# EAGLE board core (EAGLE 9.6.2), part 1 of 4
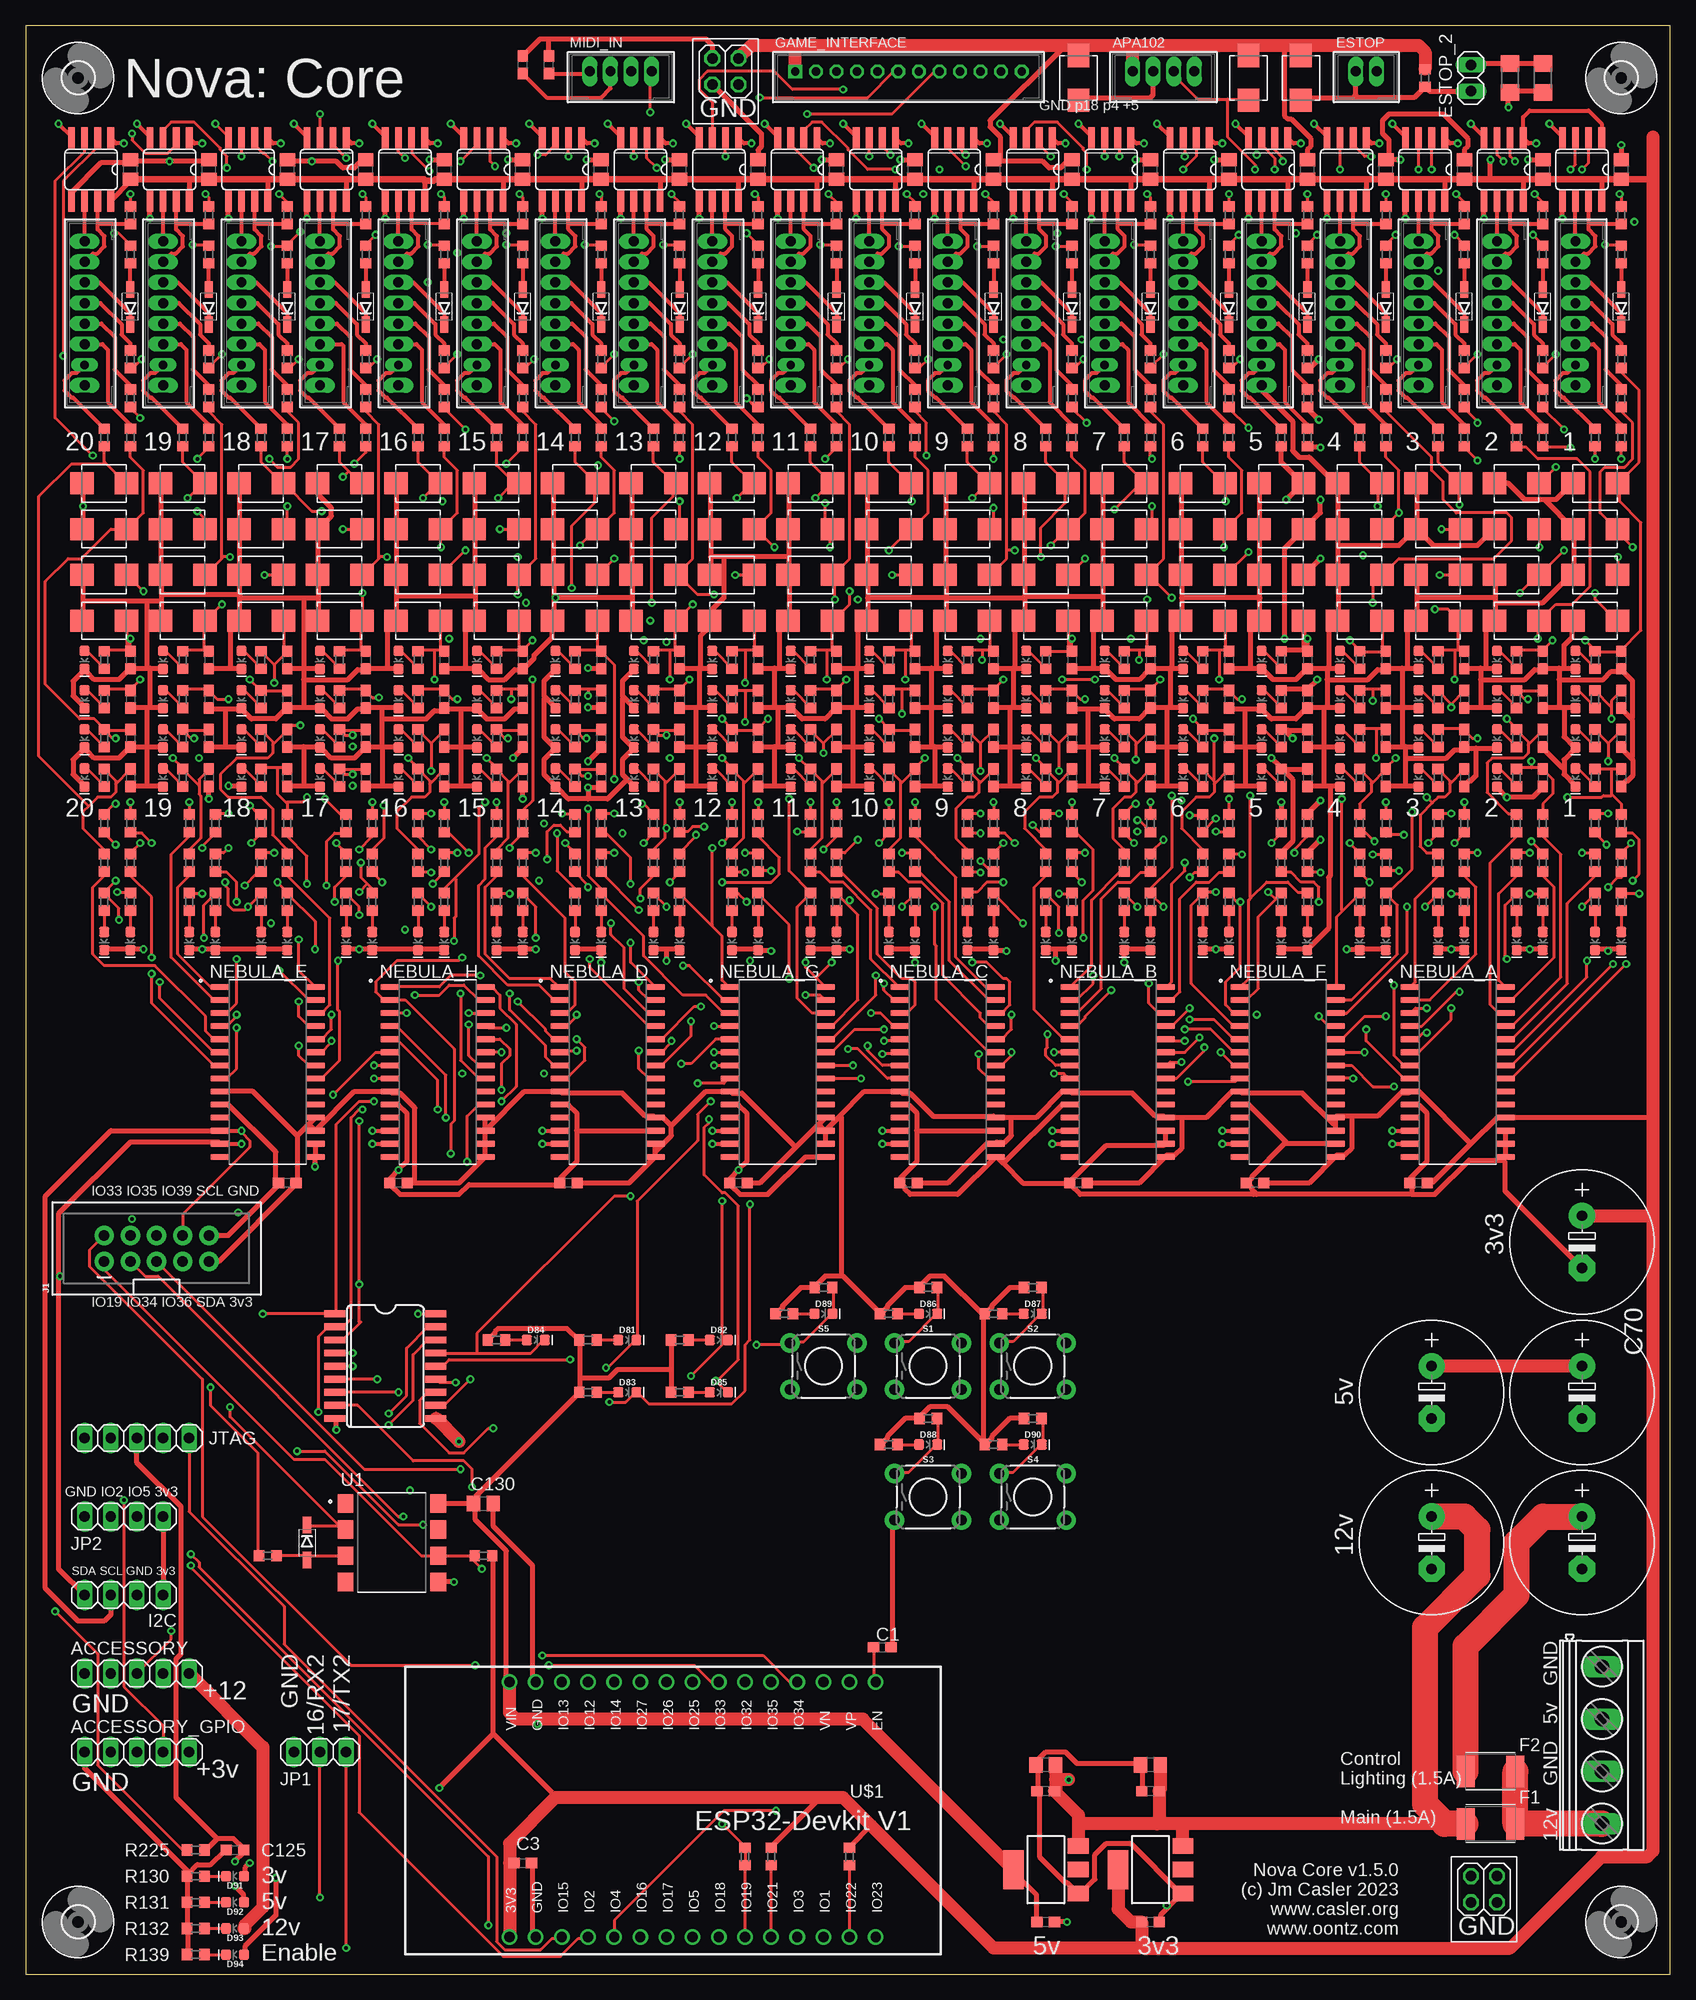
[diagram p0: board, top side]
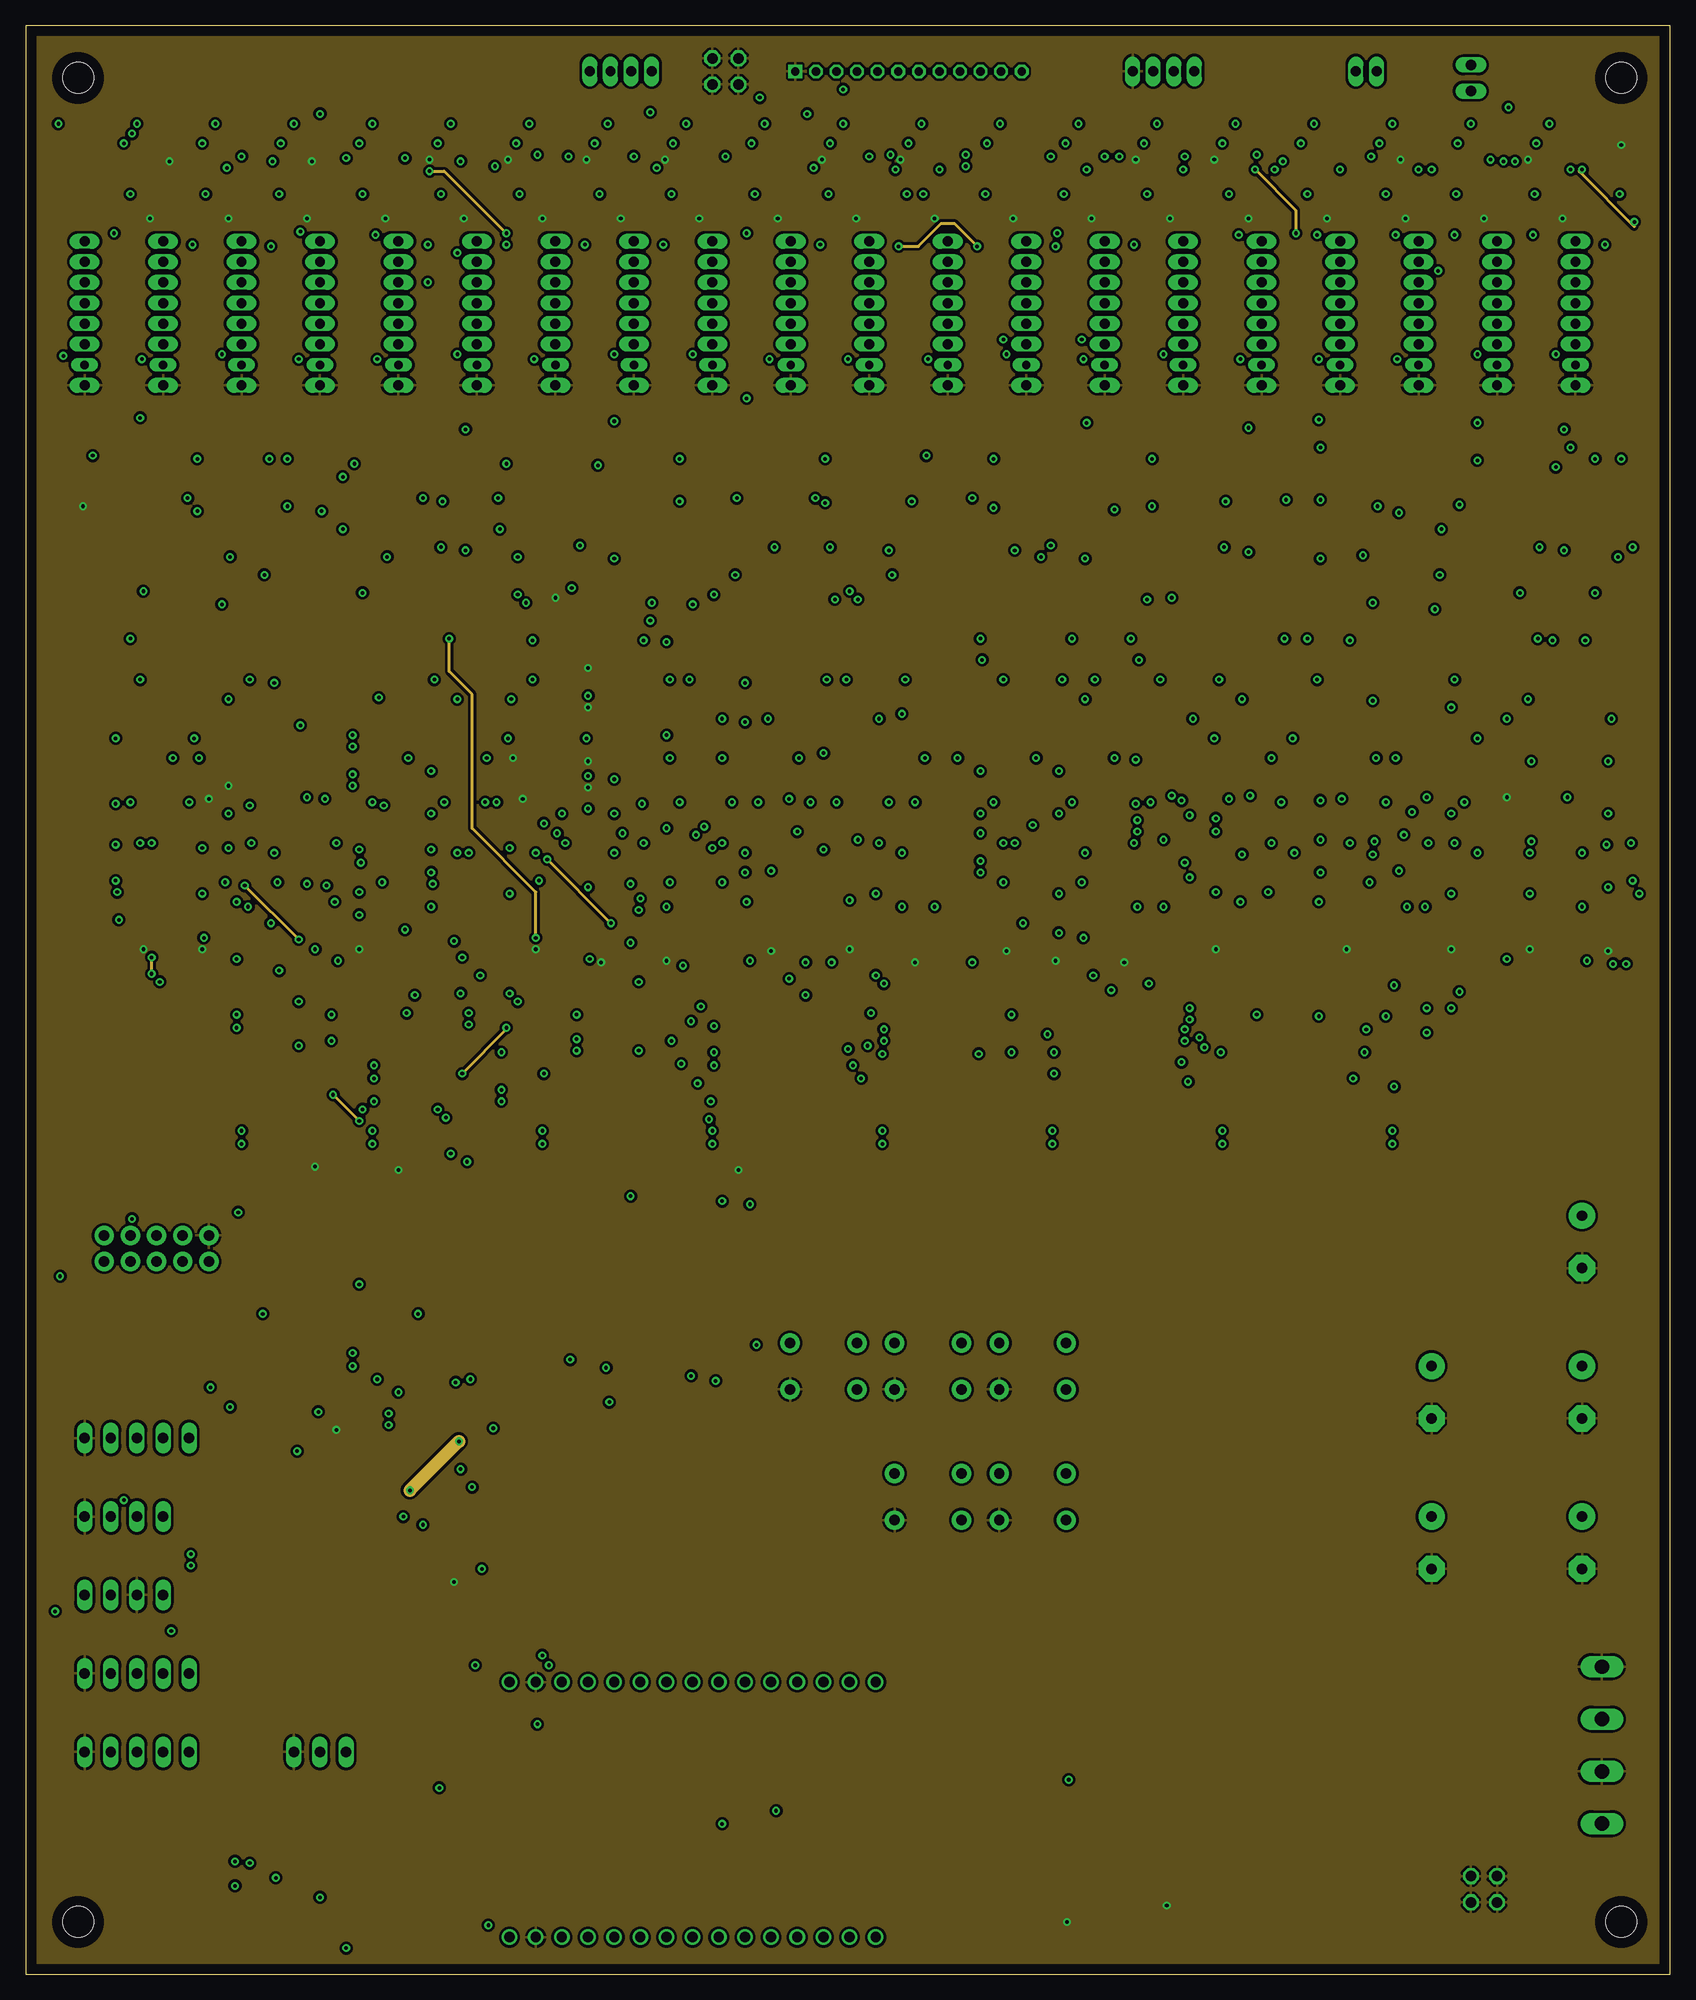
[diagram p1: board, inner layer $GND]
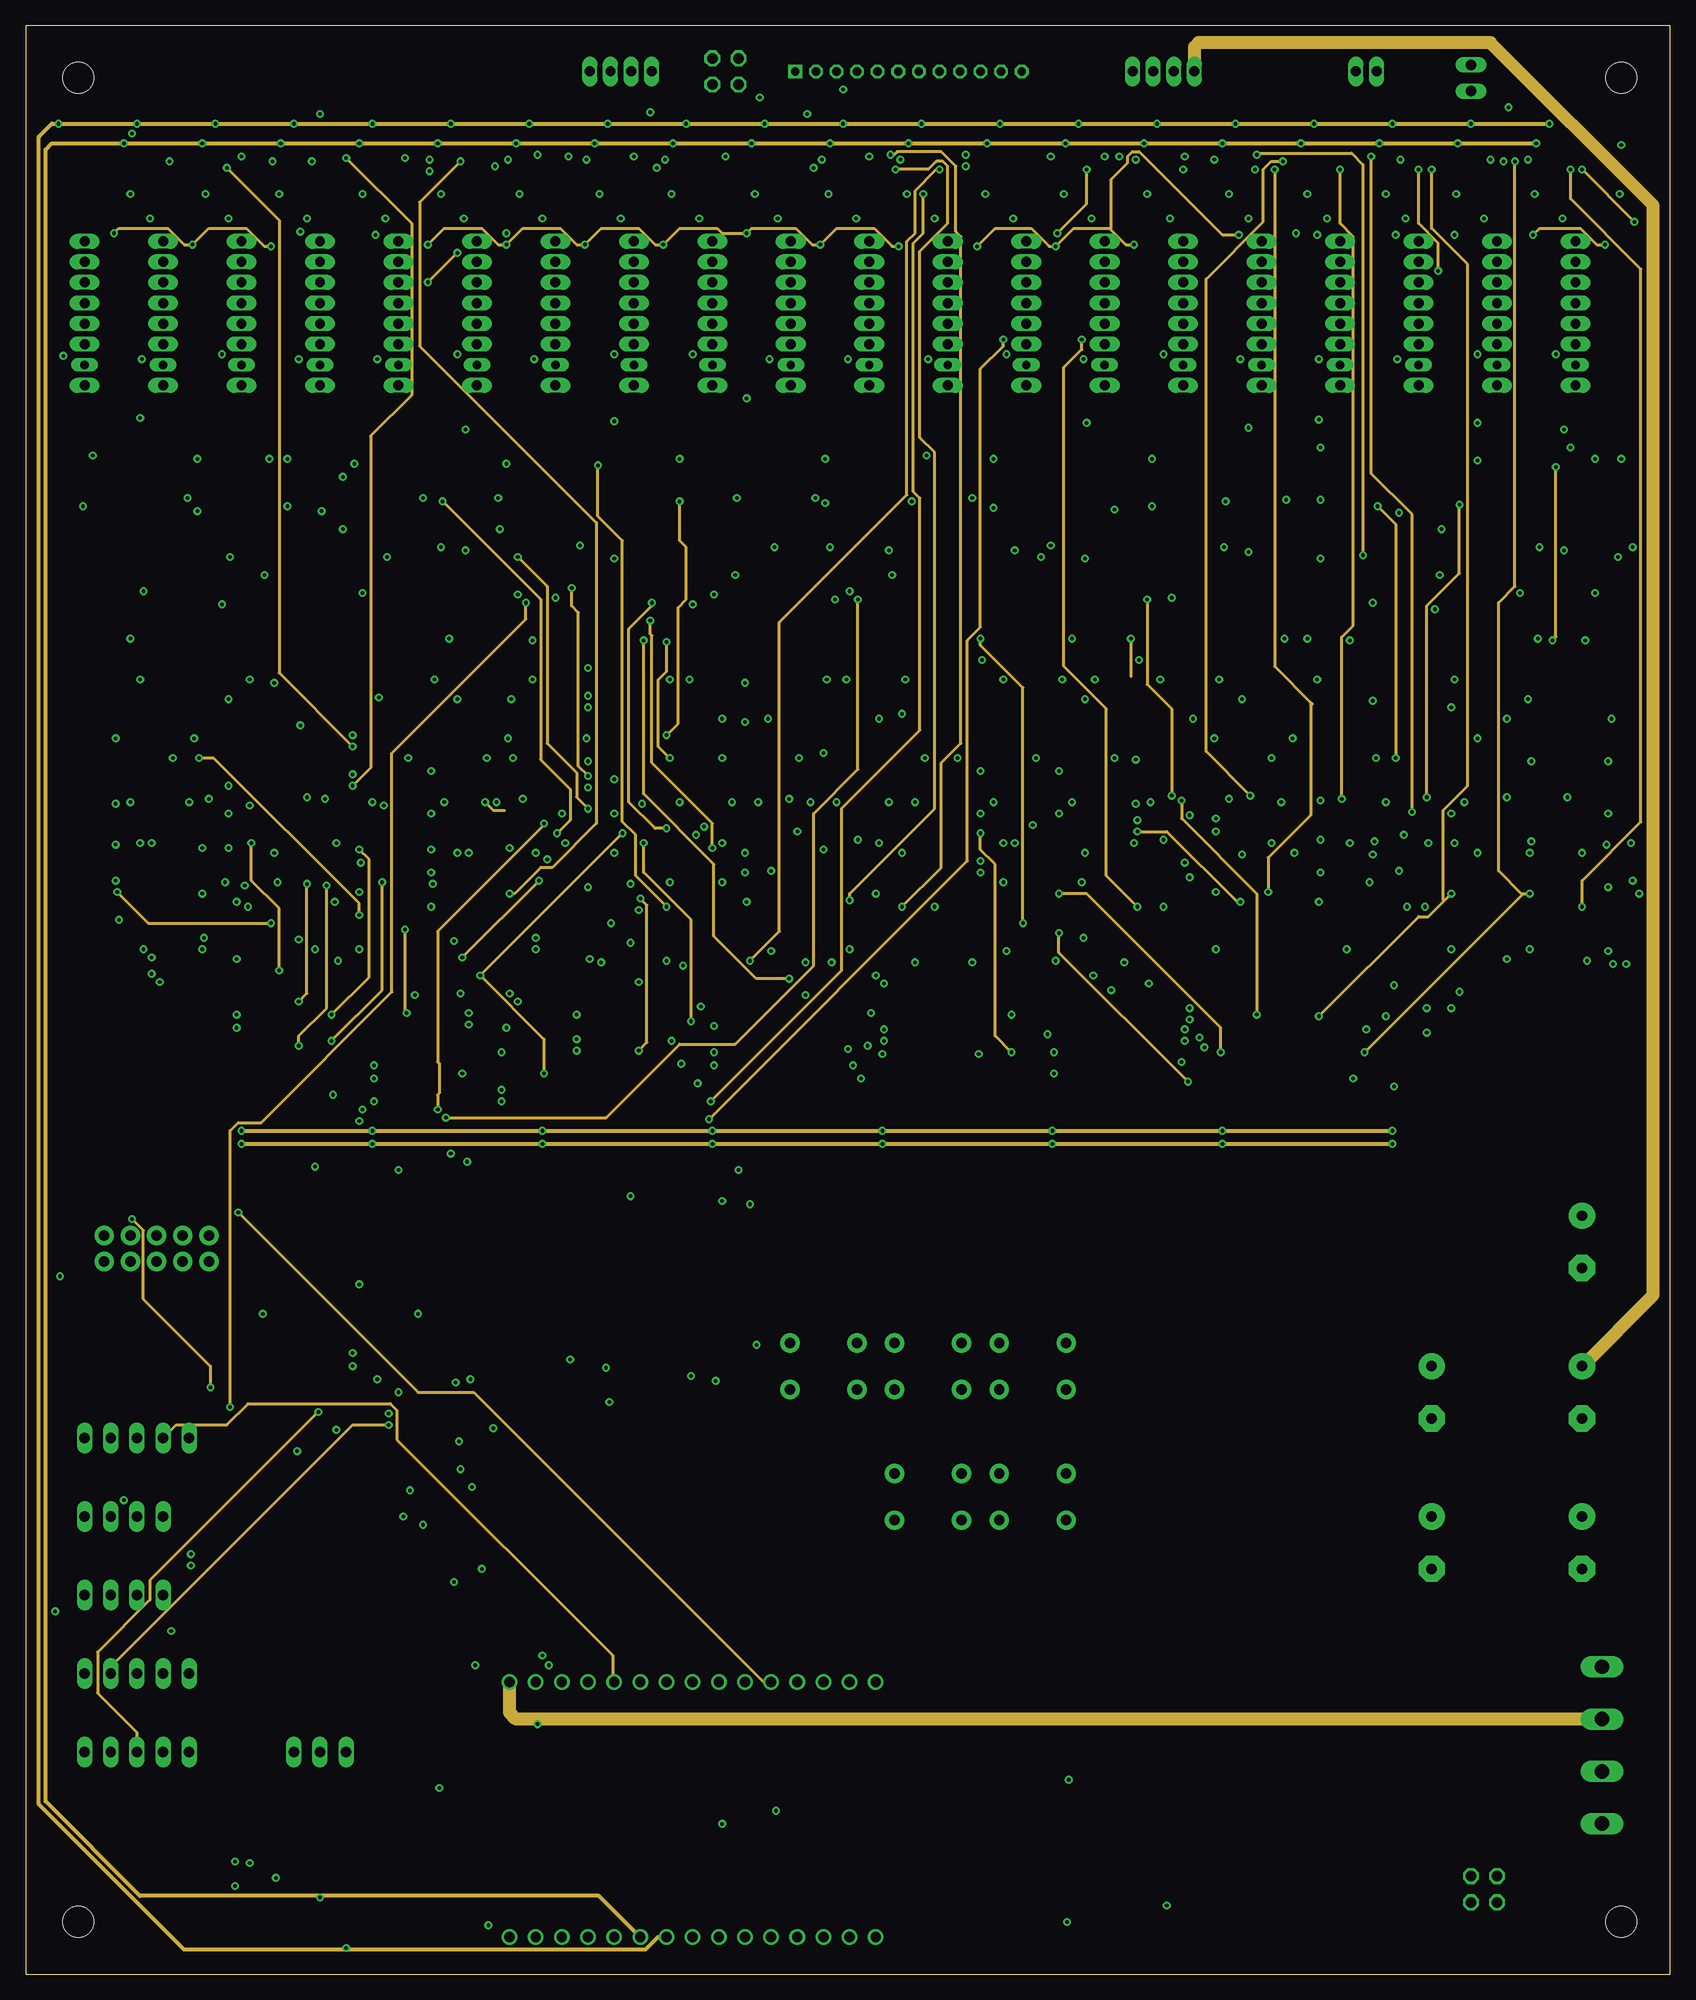
[diagram p2: board, inner layer SIGNAL3]
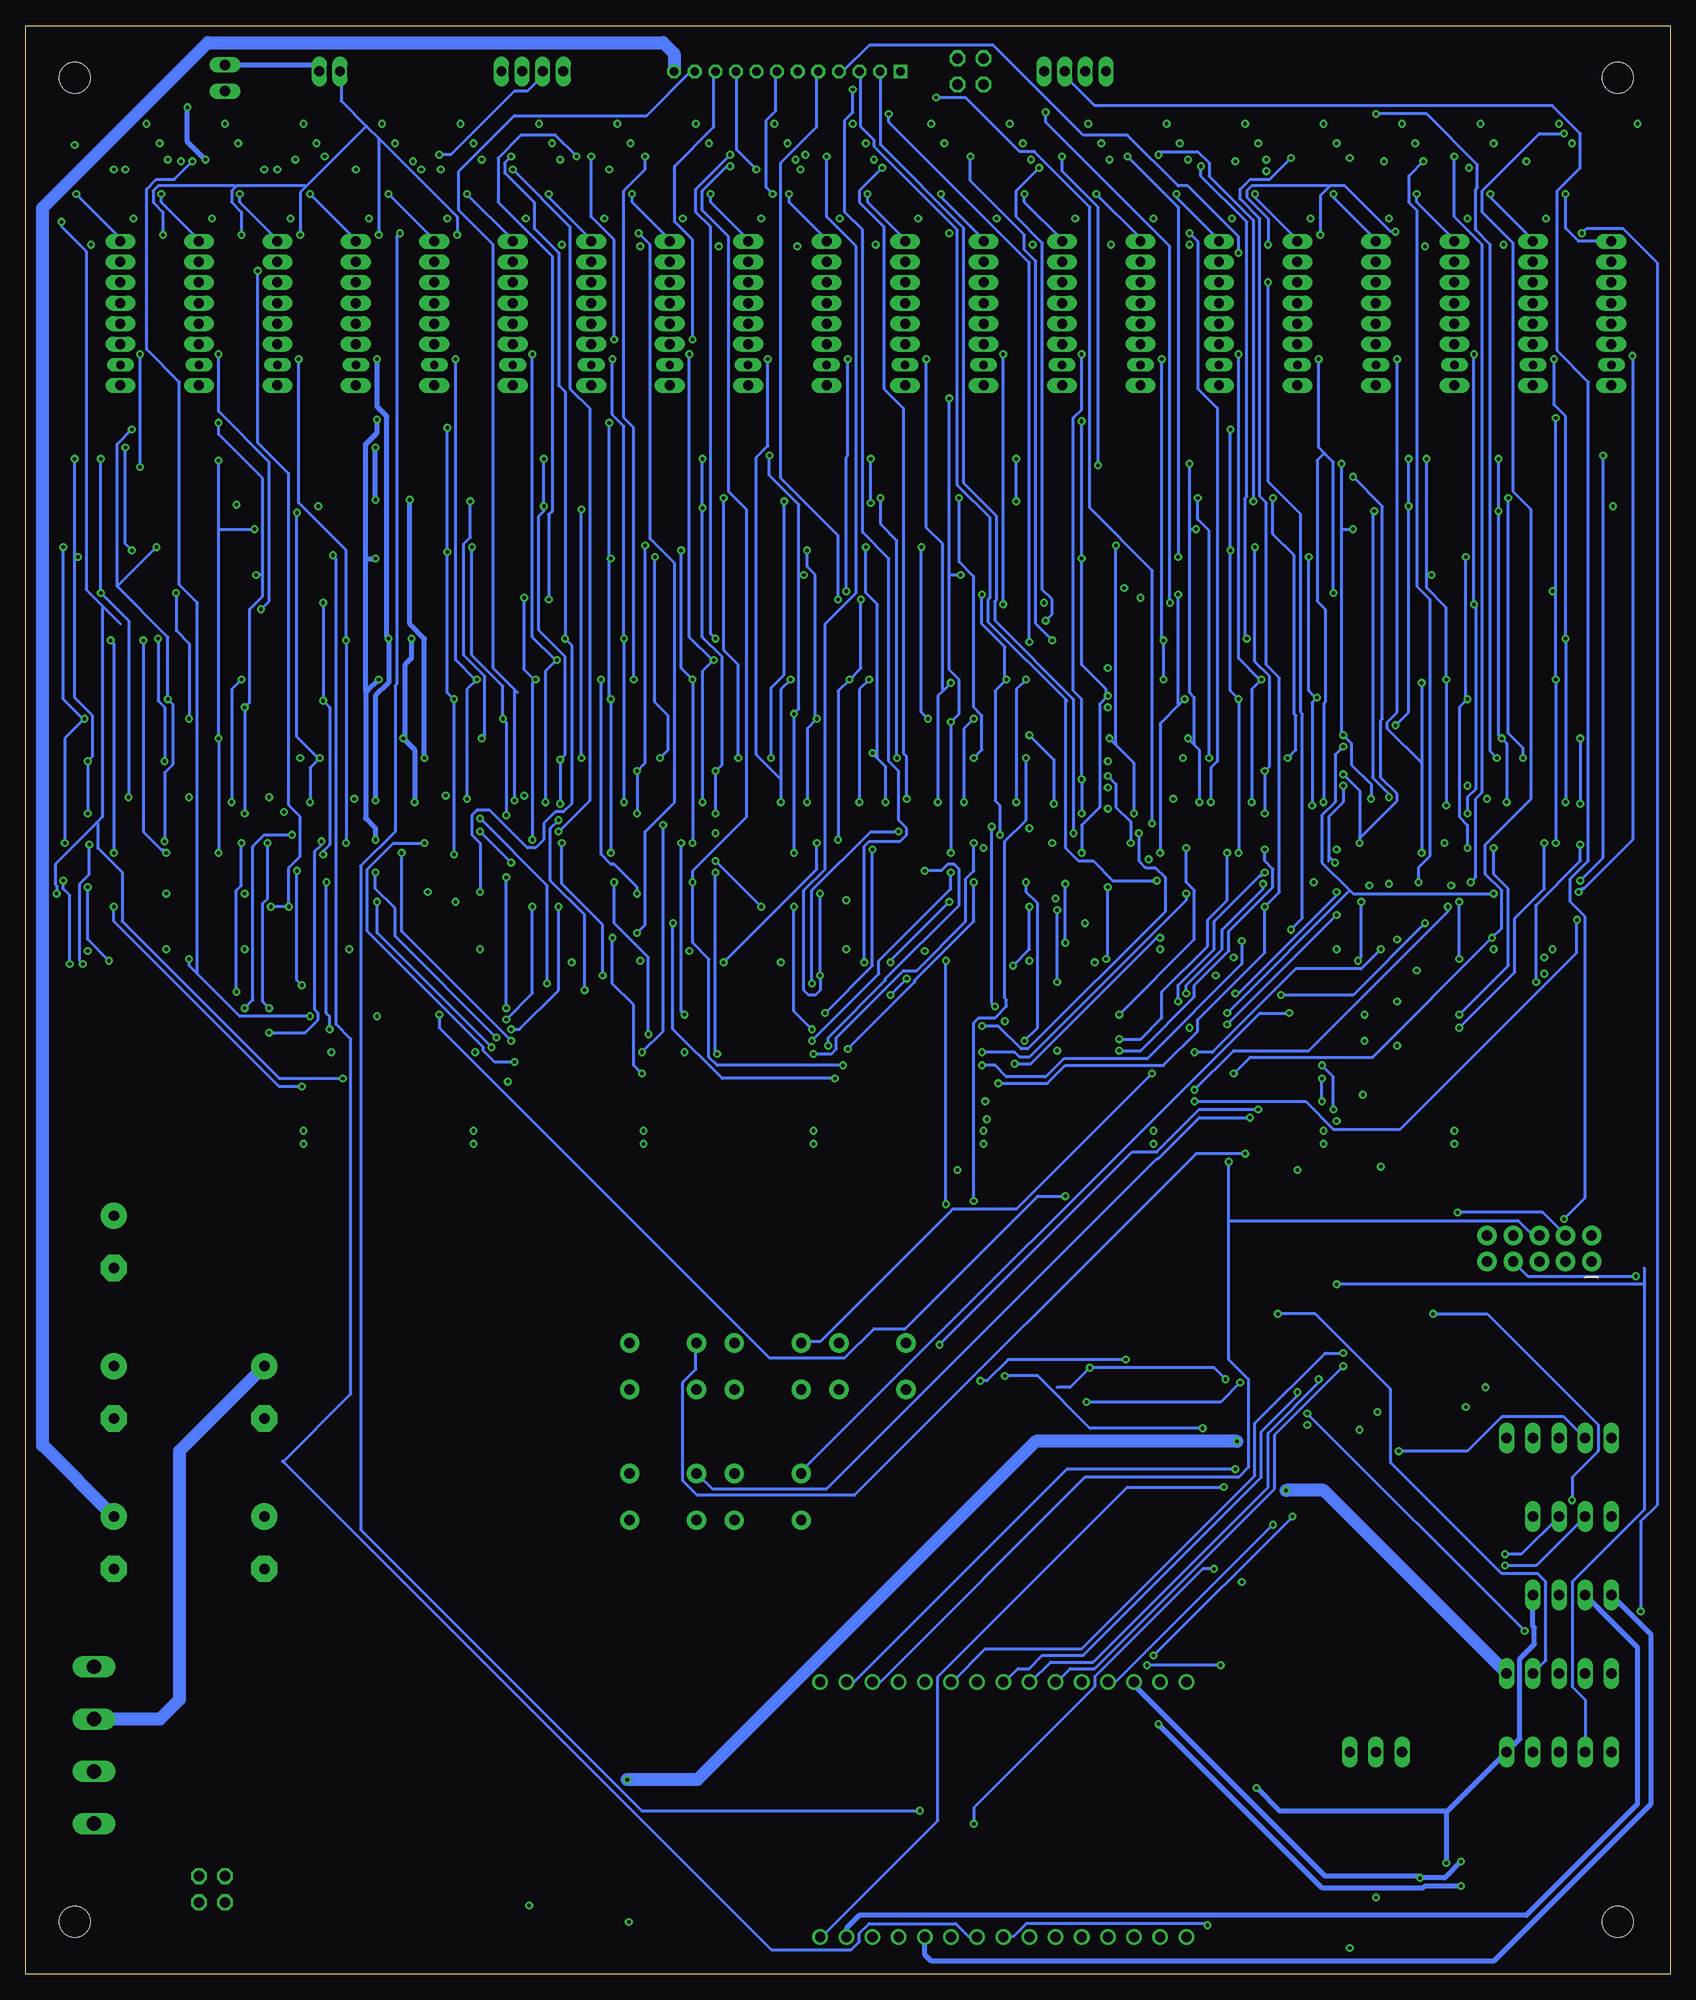
[diagram p3: board, bottom side, seen from below]

Size 159.69 x 189.22 mm. Coordinates in mm from the lower left corner, seen from the top.
Outline: 0,0 159.69,0 159.69,189.22 0,189.22 0,0
Copper layers (1+2*15+16): Top 0.035mm / dielectric 1.5mm / $GND 0.035mm / dielectric 0.15mm / SIGNAL3 0.035mm / dielectric 0.2mm / Bottom 0.035mm
Design rules "default *": minimum track width 6mil, minimum drill 0.35mm, track to track 6mil, track to pad 6mil, pad to pad 6mil, via to via 6mil, smd to smd 6mil, copper to edge 40mil, drill to drill 6mil, minimum pad ring 10mil, minimum via ring 8mil, stop-mask expansion 4mil, vias tented up to drill 20mil, thermal gap 10mil
Net classes: 0 default: width 0.305 mm, clearance 0.254 mm; 1 GND: width 0.508 mm, clearance 0.254 mm; 2 12V: width 1.27 mm, clearance 0.254 mm; 3 5V: width 0.508 mm, clearance 0.254 mm; 4 3V3: width 0.508 mm, clearance 0.254 mm

## Footprints (pad centres in the part's own frame; a part is rotated, then mirrored left to right if it is on the bottom)
1X05 = drill 1.016 long: 1 -5.08,0; 2 -2.54,0; 3 0,0; 4 2.54,0; 5 5.08,0
B4B-PH-K = drill 0.965 long: 1 -3,0; 2 -1,0; 3 1,0; 4 3,0
C0603 = smd 1.1 x 1: 1 -0.85,0; 2 0.85,0
C0805 = smd 1.3 x 1.5: 1 -0.95,0; 2 0.95,0
E5-13 = drill 1.016 pad 2.54: + -2.54,0 | drill 1.016 pad 2.54 octagon: - 2.54,0
LED-0603 = smd 1 x 1: A -0.877,0; C 0.877,0
SOD123 = smd 1.6 x 0.8: A 1.7,0; C -1.7,0
DIOM4336X265N = smd 2.28 x 2.12: 1 -2.165,0; 2 2.165,0
B2B-PH-K = drill 0.965 long: 1 -1,0; 2 1,0
1X02 = drill 1.016 long: 1 -1.27,0; 2 1.27,0
FUSC4632X160 = smd 1.73 x 3.05: 1 -2.415,0; 2 2.415,0
B12B-PH-K = drill 0.813 square: 1 -11,0 | drill 0.813 octagon: 2 -9,0; 3 -7,0; 4 -5,0; 5 -3,0; 6 -1,0; 7 1,0; 8 3,0; 9 5,0; 10 7,0; 11 9,0; 12 11,0
3,0 = hole 3: 0,0
1X04 = drill 1.016 long: 1 -3.81,0; 2 -1.27,0; 3 1.27,0; 4 3.81,0
SO08 = smd 0.66 x 2.032: 1 -1.905,-3.073; 2 -0.635,-3.073; 3 0.635,-3.073; 4 1.905,-3.073; 5 1.905,3.073; 6 0.635,3.073; 7 -0.635,3.073; 8 -1.905,3.073
SOT223 = smd 1.5 x 2: 1 -2.3,-3.15; 2 0,-3.15; 3 2.3,-3.15 | smd 3.8 x 2: 4 0,3.15
2X5-SHROUDED = drill 1.016 pad 1.88: 1 -1.27,5.08; 2 1.27,5.08; 3 -1.27,2.54; 4 1.27,2.54; 5 -1.27,0; 6 1.27,0; 7 -1.27,-2.54; 8 1.27,-2.54; 9 -1.27,-5.08; 10 1.27,-5.08
1X03 = drill 1.016 long: 1 -2.54,0; 2 0,0; 3 2.54,0
2X02 = drill 1.016 octagon: 1 -1.27,-1.27; 2 -1.27,1.27; 3 1.27,-1.27; 4 1.27,1.27
SOIC127P1030X265-28N = smd 1.9 x 0.6: 1 -4.605,8.255; 2 -4.605,6.985; 3 -4.605,5.715; 4 -4.605,4.445; 5 -4.605,3.175; 6 -4.605,1.905; 7 -4.605,0.635; 8 -4.605,-0.635; 9 -4.605,-1.905; 10 -4.605,-3.175; 11 -4.605,-4.445; 12 -4.605,-5.715; 13 -4.605,-6.985; 14 -4.605,-8.255; 15 4.605,-8.255; 16 4.605,-6.985; 17 4.605,-5.715; 18 4.605,-4.445; 19 4.605,-3.175; 20 4.605,-1.905; 21 4.605,-0.635; 22 4.605,0.635; 23 4.605,1.905; 24 4.605,3.175; 25 4.605,4.445; 26 4.605,5.715; 27 4.605,6.985; 28 4.605,8.255
MKDSN1,5/4-5,08 = drill 1.397 pad 2 long: 1 -7.641,0.025; 2 -2.561,0.025; 3 2.519,0.025; 4 7.599,0.025
R0603 = smd 1 x 1.1: 1 -0.85,0; 2 0.85,0
R1206 = smd 1.6 x 1.803: 1 -1.422,0; 2 1.422,0
TACTILE_SWITCH_PTH_6.0MM = drill 1.016 pad 1.88: 1 -3.251,2.261; 2 3.251,2.261; 3 -3.251,-2.261; 4 3.251,-2.261
B8B-PH-K = drill 0.965 long: 1 -7,0; 3 -3,0; 4 -1,0; 5 1,0; 6 3,0; 7 5,0; 8 7,0 | drill 0.813 long: 2 -5,0
COUPL_6N138SDM = smd 1.52 x 1.78: 1 -4.505,3.81; 2 -4.505,1.27; 3 -4.505,-1.27; 4 -4.505,-3.81; 5 4.505,-3.81; 6 4.505,-1.27; 7 4.505,1.27; 8 4.505,3.81
ESP32-DEVKITV1 = drill 1 pad 1.422: 1 -22.87,-13.54; 2 -20.33,-13.54; 3 -17.79,-13.54; 4 -15.25,-13.54; 5 -12.71,-13.54; 6 -10.17,-13.54; 7 -7.63,-13.54; 8 -5.09,-13.54; 9 -2.55,-13.54; 10 -0.01,-13.54; 11 2.53,-13.54; 12 5.07,-13.54; 13 7.61,-13.54; 14 10.15,-13.54; 15 12.69,-13.54; 16 12.69,11.23; 17 10.15,11.23; 18 7.61,11.23; 19 5.07,11.23; 20 2.53,11.23; 21 -0.01,11.23; 22 -2.55,11.23; 23 -5.09,11.23; 24 -7.63,11.23; 25 -10.17,11.23; 26 -12.71,11.23; 27 -15.25,11.23; 28 -17.79,11.23; 29 -20.33,11.23; 30 -22.87,11.23
SO18L = smd 0.66 x 2.032: 1 -0.635,-4.902; 2 0.635,-4.902; 3 1.905,-4.902; 4 3.175,-4.902; 5 4.445,-4.902; 6 5.715,-4.902; 7 6.985,-4.902; 8 8.255,-4.902; 9 9.525,-4.902; 10 9.525,4.902; 11 8.255,4.902; 12 6.985,4.902; 13 5.715,4.902; 14 4.445,4.902; 15 3.175,4.902; 16 1.905,4.902; 17 0.635,4.902; 18 -0.635,4.902

## Placement (x,y rotation side)
ACCESSORY  [1X05]  10.79,29.21 0 top
ACCESSORY_GPIO  [1X05]  10.79,21.59 0 top
APA102  B4B-PH-K  [B4B-PH-K]  110.49,184.78 0 top
C1  10uf  [C0603]  83.19,31.75 0 top
C2  10uf  [C0603]  99.06,17.78 180 top
C3  10uf  [C0603]  48.26,10.79 0 top
C4  1uf  [C0805]  99.06,20.32 180 top
C5  10uf  [C0603]  99.06,5.08 0 top
C6  1uf  [C0805]  109.22,20.32 180 top
C7  10uf  [C0603]  25.4,76.83 180 top
C8  10uf  [C0603]  135.25,76.83 180 top
C9  10uf  [C0603]  85.72,76.83 180 top
C10  10uf  [C0603]  102.23,76.83 180 top
C11  10uf  [C0603]  52.7,76.83 180 top
C12  10uf  [C0603]  119.38,76.83 180 top
C13  10uf  [C0603]  69.22,76.83 180 top
C14  1uf  [C0805]  154.94,175.26 90 top
C15  1uf  [C0805]  147.32,175.26 90 top
C16  1uf  [C0805]  139.7,175.26 90 top
C17  1uf  [C0805]  132.08,175.26 90 top
C18  1uf  [C0805]  124.46,175.26 90 top
C19  1uf  [C0805]  116.84,175.26 90 top
C20  1uf  [C0805]  109.22,175.26 90 top
C21  1uf  [C0805]  101.6,175.26 90 top
C22  1uf  [C0805]  93.98,175.26 90 top
C23  1uf  [C0805]  86.36,175.26 90 top
C24  1uf  [C0805]  78.74,175.26 90 top
C25  1uf  [C0805]  71.12,175.26 90 top
C26  1uf  [C0805]  10.16,175.26 90 top
C27  1uf  [C0805]  17.78,175.26 90 top
C28  1uf  [C0805]  25.4,175.26 90 top
C29  1uf  [C0805]  33.02,175.26 90 top
C30  1uf  [C0805]  40.64,175.26 90 top
C31  1uf  [C0805]  48.26,175.26 90 top
C32  1uf  [C0805]  55.88,175.26 90 top
C33  1uf  [C0805]  63.5,175.26 90 top
C34  10uf  [C0603]  36.2,76.83 180 top
C35  10uf  [C0603]  109.22,17.78 180 top
C36  10uf  [C0603]  109.22,5.08 0 top
C37  100nf  [C0603]  154.94,116.2 270 top
C38  100nf  [C0603]  154.94,120.02 270 top
C39  100nf  [C0603]  154.94,123.83 270 top
C40  100nf  [C0603]  154.94,127.64 270 top
C41  100nf  [C0603]  147.32,116.2 270 top
C42  100nf  [C0603]  147.32,120.02 270 top
C43  100nf  [C0603]  147.32,123.83 270 top
C44  100nf  [C0603]  147.32,127.64 270 top
C45  100nf  [C0603]  139.7,116.2 270 top
C46  100nf  [C0603]  139.7,120.02 270 top
C47  100nf  [C0603]  139.7,123.83 270 top
C48  100nf  [C0603]  139.7,127.64 270 top
C49  100nf  [C0603]  132.08,116.2 270 top
C50  100nf  [C0603]  132.08,120.02 270 top
C51  100nf  [C0603]  132.08,123.83 270 top
C52  100nf  [C0603]  132.08,127.64 270 top
C53  100nf  [C0603]  124.46,116.2 270 top
C54  100nf  [C0603]  124.46,120.02 270 top
C55  100nf  [C0603]  124.46,123.83 270 top
C56  100nf  [C0603]  124.46,127.64 270 top
C57  100nf  [C0603]  116.84,116.2 270 top
C58  100nf  [C0603]  116.84,120.02 270 top
C59  100nf  [C0603]  116.84,123.83 270 top
C60  100nf  [C0603]  116.84,127.64 270 top
C61  100nf  [C0603]  109.22,116.2 270 top
C62  100nf  [C0603]  109.22,120.02 270 top
C63  100nf  [C0603]  109.22,123.83 270 top
C64  100nf  [C0603]  109.22,127.64 270 top
C65  100nf  [C0603]  101.6,116.2 270 top
C66  100nf  [C0603]  101.6,120.02 270 top
C67  100nf  [C0603]  101.6,123.83 270 top
C68  100nf  [C0603]  101.6,127.64 270 top
C69  470uf  [E5-13]  151.13,56.52 270 top
C70  470uf  [E5-13]  151.13,71.12 270 top
C71  470uf  [E5-13]  136.53,56.52 270 top
C73  100nf  [C0603]  93.98,116.2 270 top
C74  100nf  [C0603]  93.98,120.02 270 top
C75  100nf  [C0603]  93.98,123.83 270 top
C76  100nf  [C0603]  93.98,127.64 270 top
C77  100nf  [C0603]  86.36,116.2 270 top
C78  100nf  [C0603]  86.36,120.02 270 top
C79  100nf  [C0603]  86.36,123.83 270 top
C80  100nf  [C0603]  86.36,127.64 270 top
C81  100nf  [C0603]  78.74,116.2 270 top
C82  100nf  [C0603]  78.74,120.02 270 top
C83  100nf  [C0603]  78.74,123.83 270 top
C84  100nf  [C0603]  78.74,127.64 270 top
C85  100nf  [C0603]  71.12,116.2 270 top
C86  100nf  [C0603]  71.12,120.02 270 top
C87  100nf  [C0603]  71.12,123.83 270 top
C88  100nf  [C0603]  71.12,127.64 270 top
C89  2200uf  [E5-13]  136.53,41.91 270 top
C90  2200uf  [E5-13]  151.13,41.91 270 top
C93  100nf  [C0603]  63.5,116.2 270 top
C94  100nf  [C0603]  63.5,120.02 270 top
C95  100nf  [C0603]  63.5,123.83 270 top
C96  100nf  [C0603]  63.5,127.64 270 top
C97  100nf  [C0603]  48.26,116.2 270 top
C98  100nf  [C0603]  48.26,120.02 270 top
C99  100nf  [C0603]  48.26,123.83 270 top
C100  100nf  [C0603]  48.26,127.64 270 top
C101  100nf  [C0603]  55.88,116.2 270 top
C102  100nf  [C0603]  55.88,120.02 270 top
C103  100nf  [C0603]  55.88,123.83 270 top
C104  100nf  [C0603]  55.88,127.64 270 top
C105  100nf  [C0603]  40.64,116.2 270 top
C106  100nf  [C0603]  40.64,120.02 270 top
C107  100nf  [C0603]  40.64,123.83 270 top
C108  100nf  [C0603]  40.64,127.64 270 top
C109  100nf  [C0603]  33.02,116.2 270 top
C110  100nf  [C0603]  33.02,120.02 270 top
C111  100nf  [C0603]  33.02,123.83 270 top
C112  100nf  [C0603]  33.02,127.64 270 top
C113  100nf  [C0603]  25.4,116.2 270 top
C114  100nf  [C0603]  25.4,120.02 270 top
C115  100nf  [C0603]  25.4,123.83 270 top
C116  100nf  [C0603]  25.4,127.64 270 top
C117  100nf  [C0603]  17.78,116.2 270 top
C118  100nf  [C0603]  17.78,120.02 270 top
C119  100nf  [C0603]  17.78,123.83 270 top
C120  100nf  [C0603]  17.78,127.64 270 top
C121  100nf  [C0603]  10.16,116.2 270 top
C122  100nf  [C0603]  10.16,120.02 270 top
C123  100nf  [C0603]  10.16,123.83 270 top
C124  1nf  [C0603]  10.16,127.64 270 top
C125  C_1NF/50V_0603  [C0603]  20.32,12.06 0 top
C126  C_100NF/50V_0603  [C0603]  50.8,185.42 90 top
C127  C_100NF/50V_0603  [C0603]  48.26,185.42 90 top
C130  1uf  [C0805]  44.45,45.72 0 top
D1  [LED-0603]  59.05,116.2 270 top
D2  [LED-0603]  150.5,116.2 270 top
D3  [LED-0603]  150.5,120.02 270 top
D4  [LED-0603]  150.5,123.83 270 top
D5  [LED-0603]  150.5,127.64 270 top
D6  [LED-0603]  142.88,116.2 270 top
D7  [LED-0603]  142.88,120.02 270 top
D8  [LED-0603]  142.88,123.83 270 top
D9  [LED-0603]  142.88,127.64 270 top
D10  [LED-0603]  135.25,116.2 270 top
D11  [LED-0603]  135.25,120.02 270 top
D12  [LED-0603]  135.25,123.83 270 top
D13  [LED-0603]  135.25,127.64 270 top
D14  [LED-0603]  127.64,116.2 270 top
D15  [LED-0603]  127.64,120.02 270 top
D16  [LED-0603]  127.64,123.83 270 top
D17  [LED-0603]  127.64,127.64 270 top
D18  [LED-0603]  120.02,116.2 270 top
D19  [LED-0603]  120.02,120.02 270 top
D20  [LED-0603]  120.02,123.83 270 top
D21  [LED-0603]  120.02,127.64 270 top
D22  [LED-0603]  112.39,116.2 270 top
D23  [LED-0603]  112.39,120.02 270 top
D24  [LED-0603]  112.39,123.83 270 top
D25  [LED-0603]  112.39,127.64 270 top
D26  [LED-0603]  104.78,116.2 270 top
D27  [LED-0603]  104.78,120.02 270 top
D28  [LED-0603]  104.78,123.83 270 top
D29  [LED-0603]  104.78,127.64 270 top
D30  [LED-0603]  97.16,116.2 270 top
D31  [LED-0603]  97.16,120.02 270 top
D32  [LED-0603]  97.16,123.83 270 top
D33  [LED-0603]  97.16,127.64 270 top
D34  [LED-0603]  89.53,116.2 270 top
D35  [LED-0603]  89.53,120.02 270 top
D36  [LED-0603]  89.53,123.83 270 top
D37  [LED-0603]  89.53,127.64 270 top
D38  [LED-0603]  81.92,116.2 270 top
D39  [LED-0603]  81.92,120.02 270 top
D40  [LED-0603]  81.92,123.83 270 top
D41  [LED-0603]  81.92,127.64 270 top
D42  [LED-0603]  74.3,116.2 270 top
D43  [LED-0603]  74.3,120.02 270 top
D44  [LED-0603]  74.3,123.83 270 top
D45  [LED-0603]  74.3,127.64 270 top
D46  [LED-0603]  66.67,116.2 270 top
D47  [LED-0603]  66.67,120.02 270 top
D48  [LED-0603]  66.67,123.83 270 top
D49  [LED-0603]  66.67,127.64 270 top
D50  [LED-0603]  59.05,120.02 270 top
D51  [LED-0603]  59.05,123.83 270 top
D52  [LED-0603]  59.05,127.64 270 top
D53  [LED-0603]  51.44,116.2 270 top
D54  [LED-0603]  51.44,120.02 270 top
D55  [LED-0603]  51.44,123.83 270 top
D56  [LED-0603]  51.44,127.64 270 top
D57  [LED-0603]  43.81,116.2 270 top
D58  [LED-0603]  43.81,120.02 270 top
D59  [LED-0603]  43.81,123.83 270 top
D60  [LED-0603]  43.81,127.64 270 top
D61  [LED-0603]  36.2,116.2 270 top
D62  [LED-0603]  36.2,120.02 270 top
D63  [LED-0603]  36.2,123.83 270 top
D64  [LED-0603]  36.2,127.64 270 top
D65  [LED-0603]  28.57,116.2 270 top
D66  [LED-0603]  28.57,120.02 270 top
D67  [LED-0603]  28.57,123.83 270 top
D68  [LED-0603]  28.57,127.64 270 top
D69  [LED-0603]  20.95,116.2 270 top
D70  [LED-0603]  20.95,120.02 270 top
D71  [LED-0603]  20.95,123.83 270 top
D72  [LED-0603]  20.95,127.64 270 top
D73  [LED-0603]  13.34,116.2 270 top
D74  [LED-0603]  13.34,120.02 270 top
D75  [LED-0603]  13.34,123.83 270 top
D76  [LED-0603]  13.34,127.64 270 top
D77  [LED-0603]  5.71,116.2 270 top
D78  [LED-0603]  5.71,120.02 270 top
D79  [LED-0603]  5.71,123.83 270 top
D80  [LED-0603]  5.71,127.64 270 top
D81  red  [LED-0603]  58.42,61.59 0 top
D82  green  [LED-0603]  67.31,61.59 0 top
D83  blue  [LED-0603]  58.42,56.52 0 top
D84  white  [LED-0603]  49.53,61.59 0 top
D85  yellow  [LED-0603]  67.31,56.52 0 top
D86  red  [LED-0603]  87.63,64.14 0 top
D87  green  [LED-0603]  97.79,64.14 0 top
D88  blue  [LED-0603]  87.63,51.44 0 top
D89  white  [LED-0603]  77.47,64.14 0 top
D90  yellow  [LED-0603]  97.79,51.44 0 top
D91  red  [LED-0603]  20.32,9.53 180 top
D92  green  [LED-0603]  20.32,6.99 180 top
D93  blue  [LED-0603]  20.32,4.45 180 top
D94  yellow  [LED-0603]  20.32,1.91 180 top
D95  D_B5819W-SL_CHANGJ_SOD123  [SOD123]  154.94,161.93 90 top
D96  D_B5819W-SL_CHANGJ_SOD123  [SOD123]  147.32,161.93 90 top
D97  D_B5819W-SL_CHANGJ_SOD123  [SOD123]  139.7,161.93 90 top
D98  D_B5819W-SL_CHANGJ_SOD123  [SOD123]  132.08,161.93 90 top
D99  D_B5819W-SL_CHANGJ_SOD123  [SOD123]  124.46,161.93 90 top
D100  D_B5819W-SL_CHANGJ_SOD123  [SOD123]  116.84,161.93 90 top
D101  D_B5819W-SL_CHANGJ_SOD123  [SOD123]  109.22,161.93 90 top
D102  D_B5819W-SL_CHANGJ_SOD123  [SOD123]  101.6,161.93 90 top
D103  D_B5819W-SL_CHANGJ_SOD123  [SOD123]  93.98,161.93 90 top
D104  D_B5819W-SL_CHANGJ_SOD123  [SOD123]  63.5,161.93 90 top
D105  D_B5819W-SL_CHANGJ_SOD123  [SOD123]  33.02,161.93 90 top
D106  D_B5819W-SL_CHANGJ_SOD123  [SOD123]  86.36,161.93 90 top
D107  D_B5819W-SL_CHANGJ_SOD123  [SOD123]  78.74,161.93 90 top
D108  D_B5819W-SL_CHANGJ_SOD123  [SOD123]  71.12,161.93 90 top
D109  D_B5819W-SL_CHANGJ_SOD123  [SOD123]  55.88,161.93 90 top
D110  D_B5819W-SL_CHANGJ_SOD123  [SOD123]  48.26,161.93 90 top
D111  D_B5819W-SL_CHANGJ_SOD123  [SOD123]  40.64,161.93 90 top
D112  D_B5819W-SL_CHANGJ_SOD123  [SOD123]  25.4,161.93 90 top
D113  D_B5819W-SL_CHANGJ_SOD123  [SOD123]  17.78,161.93 90 top
D114  D_B5819W-SL_CHANGJ_SOD123  [SOD123]  10.16,161.93 90 top
D115  SMBJ8.0CA  [DIOM4336X265N]  152.4,135.89 0 top
D116  SMBJ8.0CA  [DIOM4336X265N]  152.4,131.44 0 top
D117  SMBJ8.0CA  [DIOM4336X265N]  152.4,140.34 0 top
D118  SMBJ8.0CA  [DIOM4336X265N]  152.4,144.78 0 top
D119  SMBJ8.0CA  [DIOM4336X265N]  144.78,131.44 0 top
D120  SMBJ8.0CA  [DIOM4336X265N]  144.78,135.89 0 top
D121  SMBJ8.0CA  [DIOM4336X265N]  144.78,140.34 0 top
D122  SMBJ8.0CA  [DIOM4336X265N]  144.78,144.78 0 top
D123  SMBJ8.0CA  [DIOM4336X265N]  137.16,144.78 0 top
D124  SMBJ8.0CA  [DIOM4336X265N]  137.16,140.34 0 top
D125  SMBJ8.0CA  [DIOM4336X265N]  137.16,135.89 0 top
D126  SMBJ8.0CA  [DIOM4336X265N]  137.16,131.44 0 top
D127  SMBJ8.0CA  [DIOM4336X265N]  129.54,144.78 0 top
D128  SMBJ8.0CA  [DIOM4336X265N]  129.54,140.34 0 top
D129  SMBJ8.0CA  [DIOM4336X265N]  129.54,135.89 0 top
D130  SMBJ8.0CA  [DIOM4336X265N]  129.54,131.44 0 top
D131  SMBJ8.0CA  [DIOM4336X265N]  121.92,144.78 0 top
D132  SMBJ8.0CA  [DIOM4336X265N]  121.92,140.34 0 top
D133  SMBJ8.0CA  [DIOM4336X265N]  121.92,135.89 0 top
D134  SMBJ8.0CA  [DIOM4336X265N]  121.92,131.44 0 top
D135  SMBJ8.0CA  [DIOM4336X265N]  114.3,144.78 0 top
D136  SMBJ8.0CA  [DIOM4336X265N]  114.3,140.34 0 top
D137  SMBJ8.0CA  [DIOM4336X265N]  114.3,135.89 0 top
D138  SMBJ8.0CA  [DIOM4336X265N]  114.3,131.44 0 top
D139  SMBJ8.0CA  [DIOM4336X265N]  106.68,144.78 0 top
D140  SMBJ8.0CA  [DIOM4336X265N]  106.68,140.34 0 top
D141  SMBJ8.0CA  [DIOM4336X265N]  106.68,135.89 0 top
D142  SMBJ8.0CA  [DIOM4336X265N]  106.68,131.44 0 top
D143  SMBJ8.0CA  [DIOM4336X265N]  99.06,144.78 0 top
D144  SMBJ8.0CA  [DIOM4336X265N]  99.06,140.34 0 top
D145  SMBJ8.0CA  [DIOM4336X265N]  99.06,135.89 0 top
D146  SMBJ8.0CA  [DIOM4336X265N]  99.06,131.44 0 top
D147  SMBJ8.0CA  [DIOM4336X265N]  91.44,144.78 0 top
D148  SMBJ8.0CA  [DIOM4336X265N]  91.44,140.34 0 top
D149  SMBJ8.0CA  [DIOM4336X265N]  91.44,135.89 0 top
D150  SMBJ8.0CA  [DIOM4336X265N]  91.44,131.44 0 top
D151  SMBJ8.0CA  [DIOM4336X265N]  83.82,144.78 0 top
D152  SMBJ8.0CA  [DIOM4336X265N]  83.82,140.34 0 top
D153  SMBJ8.0CA  [DIOM4336X265N]  83.82,135.89 0 top
D154  SMBJ8.0CA  [DIOM4336X265N]  83.82,131.44 0 top
D155  SMBJ8.0CA  [DIOM4336X265N]  76.2,144.78 0 top
D156  SMBJ8.0CA  [DIOM4336X265N]  76.2,140.34 0 top
D157  SMBJ8.0CA  [DIOM4336X265N]  76.2,135.89 0 top
D158  SMBJ8.0CA  [DIOM4336X265N]  76.2,131.44 0 top
D159  SMBJ8.0CA  [DIOM4336X265N]  68.58,144.78 0 top
D160  SMBJ8.0CA  [DIOM4336X265N]  68.58,140.34 0 top
D161  SMBJ8.0CA  [DIOM4336X265N]  68.58,135.89 0 top
D162  SMBJ8.0CA  [DIOM4336X265N]  68.58,131.44 0 top
D163  SMBJ8.0CA  [DIOM4336X265N]  60.96,144.78 0 top
D164  SMBJ8.0CA  [DIOM4336X265N]  60.96,140.34 0 top
D165  SMBJ8.0CA  [DIOM4336X265N]  60.96,135.89 0 top
D166  SMBJ8.0CA  [DIOM4336X265N]  60.96,131.44 0 top
D167  SMBJ8.0CA  [DIOM4336X265N]  53.34,144.78 0 top
D168  SMBJ8.0CA  [DIOM4336X265N]  53.34,140.34 0 top
D169  SMBJ8.0CA  [DIOM4336X265N]  53.34,135.89 0 top
D170  SMBJ8.0CA  [DIOM4336X265N]  53.34,131.44 0 top
D171  SMBJ8.0CA  [DIOM4336X265N]  123.83,184.15 270 top
D172  SMBJ8.0CA  [DIOM4336X265N]  45.72,144.78 0 top
D173  SMBJ8.0CA  [DIOM4336X265N]  45.72,140.34 0 top
D174  SMBJ8.0CA  [DIOM4336X265N]  45.72,135.89 0 top
D175  SMBJ8.0CA  [DIOM4336X265N]  45.72,131.44 0 top
D176  SMBJ8.0CA  [DIOM4336X265N]  38.1,144.78 0 top
D177  SMBJ8.0CA  [DIOM4336X265N]  38.1,140.34 0 top
D178  SMBJ8.0CA  [DIOM4336X265N]  38.1,135.89 0 top
D179  SMBJ8.0CA  [DIOM4336X265N]  38.1,131.44 0 top
D180  SMBJ8.0CA  [DIOM4336X265N]  30.48,144.78 0 top
D181  SMBJ8.0CA  [DIOM4336X265N]  30.48,140.34 0 top
D182  SMBJ8.0CA  [DIOM4336X265N]  30.48,135.89 0 top
D183  SMBJ8.0CA  [DIOM4336X265N]  30.48,131.44 0 top
D184  SMBJ8.0CA  [DIOM4336X265N]  22.86,144.78 0 top
D185  SMBJ8.0CA  [DIOM4336X265N]  22.86,140.34 0 top
D186  SMBJ8.0CA  [DIOM4336X265N]  22.86,135.89 0 top
D187  SMBJ8.0CA  [DIOM4336X265N]  22.86,131.44 0 top
D188  SMBJ8.0CA  [DIOM4336X265N]  15.24,144.78 0 top
D189  SMBJ8.0CA  [DIOM4336X265N]  15.24,140.34 0 top
D190  SMBJ8.0CA  [DIOM4336X265N]  15.24,135.89 0 top
D191  SMBJ8.0CA  [DIOM4336X265N]  15.24,131.44 0 top
D192  SMBJ8.0CA  [DIOM4336X265N]  7.62,144.78 0 top
D193  SMBJ8.0CA  [DIOM4336X265N]  7.62,140.34 0 top
D194  SMBJ8.0CA  [DIOM4336X265N]  7.62,135.89 0 top
D195  SMBJ8.0CA  [DIOM4336X265N]  7.62,131.44 0 top
D196  SMBJ8.0CA  [DIOM4336X265N]  118.75,184.15 270 top
D197  SMBJ8.0CA  [DIOM4336X265N]  102.23,184.15 270 top
D198  D_B5819W-SL_CHANGJ_SOD123  [SOD123]  27.3,41.91 270 top
D199  [LED-0603]  152.4,100.33 270 top
D200  [LED-0603]  154.94,100.33 270 top
D201  [LED-0603]  144.78,100.33 270 top
D202  [LED-0603]  147.32,100.33 270 top
D203  [LED-0603]  137.16,100.33 270 top
D204  [LED-0603]  139.7,100.33 270 top
D205  [LED-0603]  129.54,100.33 270 top
D206  [LED-0603]  132.08,100.33 270 top
D207  [LED-0603]  121.92,100.33 270 top
D208  [LED-0603]  124.46,100.33 270 top
D209  [LED-0603]  114.3,100.33 270 top
D210  [LED-0603]  116.84,100.33 270 top
D211  [LED-0603]  106.68,100.33 270 top
D212  [LED-0603]  109.22,100.33 270 top
D213  [LED-0603]  99.06,100.33 270 top
D214  [LED-0603]  101.6,100.33 270 top
D215  [LED-0603]  91.44,100.33 270 top
D216  [LED-0603]  93.98,100.33 270 top
D217  [LED-0603]  83.82,100.33 270 top
D218  [LED-0603]  86.36,100.33 270 top
D219  [LED-0603]  76.2,100.33 270 top
D220  [LED-0603]  78.74,100.33 270 top
D221  [LED-0603]  68.58,100.33 270 top
D222  [LED-0603]  71.12,100.33 270 top
D223  [LED-0603]  60.96,100.33 270 top
D224  [LED-0603]  63.5,100.33 270 top
D225  [LED-0603]  53.34,100.33 270 top
D226  [LED-0603]  55.88,100.33 270 top
D227  [LED-0603]  45.72,100.33 270 top
D228  [LED-0603]  48.26,100.33 270 top
D229  [LED-0603]  38.1,100.33 270 top
D230  [LED-0603]  40.64,100.33 270 top
D231  [LED-0603]  31.11,100.33 270 top
D232  [LED-0603]  33.66,100.33 270 top
D233  [LED-0603]  22.86,100.33 270 top
D234  [LED-0603]  25.4,100.33 270 top
D235  [LED-0603]  15.88,100.33 270 top
D236  [LED-0603]  18.41,100.33 270 top
D237  [LED-0603]  7.62,100.33 270 top
D238  [LED-0603]  10.16,100.33 270 top
ESTOP  B2B-PH-K  [B2B-PH-K]  130.18,184.78 0 top
ESTOP_2  [1X02]  140.34,184.15 90 top
F1  MF-MSMF-STYLE2_1  [FUSC4632X160]  142.24,14.61 180 top
F2  MF-MSMF-STYLE2_1  [FUSC4632X160]  142.24,19.68 180 top
GAME_INTERFACE  B12B-PH-K  [B12B-PH-K]  85.72,184.78 0 top
H1  MOUNT-HOLE3.0  [3,0]  154.94,5.08 0 top
H2  MOUNT-HOLE3.0  [3,0]  154.94,184.15 0 top
H3  MOUNT-HOLE3.0  [3,0]  5.08,184.15 0 top
H4  MOUNT-HOLE3.0  [3,0]  5.08,5.08 0 top
I2C  [1X04]  9.53,36.83 180 top
IC1  MAX481CSA  [SO08]  151.13,175.26 180 top
IC2  LD117AS12TR  [SOT223]  99.06,10.16 90 top
IC3  MAX481CSA  [SO08]  143.51,175.26 180 top
IC4  MAX481CSA  [SO08]  135.89,175.26 180 top
IC5  MAX481CSA  [SO08]  128.27,175.26 180 top
IC6  MAX481CSA  [SO08]  120.65,175.26 180 top
IC7  MAX481CSA  [SO08]  113.03,175.26 180 top
IC8  MAX481CSA  [SO08]  105.41,175.26 180 top
IC9  MAX481CSA  [SO08]  97.79,175.26 180 top
IC10  MAX481CSA  [SO08]  90.17,175.26 180 top
IC11  MAX481CSA  [SO08]  82.55,175.26 180 top
IC12  MAX481CSA  [SO08]  74.93,175.26 180 top
IC13  MAX481CSA  [SO08]  67.31,175.26 180 top
IC14  MAX481CSA  [SO08]  59.69,175.26 180 top
IC15  MAX481CSA  [SO08]  52.07,175.26 180 top
IC16  MAX481CSA  [SO08]  44.45,175.26 180 top
IC17  MAX481CSA  [SO08]  36.83,175.26 180 top
IC18  MAX481CSA  [SO08]  29.21,175.26 180 top
IC19  MAX481CSA  [SO08]  21.59,175.26 180 top
IC20  MAX481CSA  [SO08]  13.97,175.26 180 top
IC21  MAX481CSA  [SO08]  6.35,175.26 180 top
IC22  LD117AS12TR  [SOT223]  109.22,10.16 90 top
J1  [2X5-SHROUDED]  12.7,70.48 90 top
JP1  [1X03]  28.57,21.59 0 top
JP2  [1X04]  9.53,44.45 0 top
JP3  [2X02]  67.94,184.78 0 top
JP4  [2X02]  141.6,8.26 0 top
JTAG  [1X05]  10.79,52.07 0 top
MIDI_IN  B4B-PH-K  [B4B-PH-K]  57.78,184.78 0 top
NEBULA_A  MCP23017-E/SO  [SOIC127P1030X265-28N]  139.06,87.63 0 top
NEBULA_B  MCP23017-E/SO  [SOIC127P1030X265-28N]  106.05,87.63 0 top
NEBULA_C  MCP23017-E/SO  [SOIC127P1030X265-28N]  89.53,87.63 0 top
NEBULA_D  MCP23017-E/SO  [SOIC127P1030X265-28N]  56.52,87.63 0 top
NEBULA_E  MCP23017-E/SO  [SOIC127P1030X265-28N]  23.5,87.63 0 top
NEBULA_F  MCP23017-E/SO  [SOIC127P1030X265-28N]  122.56,87.63 0 top
NEBULA_G  MCP23017-E/SO  [SOIC127P1030X265-28N]  73.03,87.63 0 top
NEBULA_H  MCP23017-E/SO  [SOIC127P1030X265-28N]  40.01,87.63 0 top
POWER_IN  MKDSN1,5/4-5,08  [MKDSN1,5/4-5,08]  153.03,22.23 270 top
R1  120  [R0603]  154.94,170.81 270 top
R2  120  [R0603]  147.32,170.81 270 top
R3  1k  [R0603]  152.4,116.2 270 top
R4  1k  [R0603]  152.4,120.02 270 top
R5  1k  [R0603]  152.4,123.83 270 top
R6  1k  [R0603]  152.4,127.64 270 top
R7  1k  [R0603]  144.78,116.2 270 top
R8  1k  [R0603]  144.78,120.02 270 top
R9  1k  [R0603]  144.78,123.83 270 top
R10  1k  [R0603]  144.78,127.64 270 top
R11  1k  [R0603]  137.16,116.2 270 top
R12  1k  [R0603]  137.16,120.02 270 top
R13  1k  [R0603]  137.16,123.83 270 top
R14  1k  [R0603]  137.16,127.64 270 top
R15  1k  [R0603]  129.54,116.2 270 top
R16  1k  [R0603]  129.54,120.02 270 top
R17  1k  [R0603]  129.54,123.83 270 top
R18  1k  [R0603]  129.54,127.64 270 top
R19  1k  [R0603]  121.92,116.2 270 top
R20  1k  [R0603]  121.92,120.02 270 top
R21  1k  [R0603]  121.92,123.83 270 top
R22  1k  [R0603]  121.92,127.64 270 top
R23  1k  [R0603]  114.3,116.2 270 top
R24  1k  [R0603]  114.3,120.02 270 top
R25  1k  [R0603]  114.3,123.83 270 top
R26  R_2K_0603  [R0603]  72.39,11.43 90 top
R27  R_2K_0603  [R0603]  80.01,11.43 90 top
R28  1k  [R0603]  114.3,127.64 270 top
R29  1k  [R0603]  106.68,116.2 270 top
R30  1k  [R0603]  106.68,120.02 270 top
R31  1k  [R0603]  106.68,123.83 270 top
R32  1k  [R0603]  106.68,127.64 270 top
R33  1k  [R0603]  99.06,116.2 270 top
R34  1k  [R0603]  99.06,120.02 270 top
R35  1k  [R0603]  99.06,123.83 270 top
R36  1k  [R0603]  99.06,127.64 270 top
R37  1k  [R0603]  91.44,116.2 270 top
R38  1k  [R0603]  91.44,120.02 270 top
R39  1k  [R0603]  91.44,123.83 270 top
R40  1k  [R0603]  91.44,127.64 270 top
R41  1k  [R0603]  83.82,116.2 270 top
R42  1k  [R0603]  83.82,120.02 270 top
R43  1k  [R0603]  83.82,123.83 270 top
R44  1k  [R0603]  83.82,127.64 270 top
R45  1k  [R0603]  76.2,116.2 270 top
R46  1k  [R0603]  76.2,120.02 270 top
R47  1k  [R0603]  76.2,123.83 270 top
R48  1k  [R0603]  76.2,127.64 270 top
R49  1k  [R0603]  68.58,116.2 270 top
R50  1k  [R0603]  68.58,120.02 270 top
R51  1k  [R0603]  68.58,123.83 270 top
R52  1k  [R0603]  68.58,127.64 270 top
R53  1k  [R0603]  60.96,116.2 270 top
R54  68  [R0603]  154.94,167 270 top
R55  68  [R0603]  147.32,167 270 top
R56  68  [R0603]  139.7,167 270 top
R57  68  [R0603]  132.08,167 270 top
R58  68  [R0603]  124.46,167 270 top
R59  68  [R0603]  116.84,167 270 top
R60  68  [R0603]  109.22,167 270 top
R61  68  [R0603]  101.6,167 270 top
R62  68  [R0603]  93.98,167 270 top
R63  68  [R0603]  86.36,167 270 top
R64  68  [R0603]  78.74,167 270 top
R65  68  [R0603]  71.12,167 270 top
R66  1k  [R0603]  60.96,120.02 270 top
R67  10k  [R0603]  135.89,184.15 90 top
R68  10  [R1206]  147.32,184.15 270 top
R69  1k  [R0603]  60.96,123.83 270 top
R70  1k  [R0603]  60.96,127.64 270 top
R71  1k  [R0603]  53.34,116.2 270 top
R72  1k  [R0603]  53.34,120.02 270 top
R73  1k  [R0603]  53.34,123.83 270 top
R74  1k  [R0603]  53.34,127.64 270 top
R75  1k  [R0603]  45.72,116.2 270 top
R76  1k  [R0603]  45.72,120.02 270 top
R77  1k  [R0603]  45.72,123.83 270 top
R78  1k  [R0603]  45.72,127.64 270 top
R79  1k  [R0603]  38.1,116.2 270 top
R80  1k  [R0603]  38.1,120.02 270 top
R81  1k  [R0603]  38.1,123.83 270 top
R82  1k  [R0603]  38.1,127.64 270 top
R83  68  [R0603]  63.5,167 270 top
R84  68  [R0603]  55.88,167 270 top
R85  68  [R0603]  48.26,167 270 top
R86  68  [R0603]  40.64,167 270 top
R87  1k  [R0603]  30.48,116.2 270 top
R88  1k  [R0603]  30.48,120.02 270 top
R89  1k  [R0603]  30.48,123.83 270 top
R90  1k  [R0603]  30.48,127.64 270 top
R91  1k  [R0603]  22.86,116.2 270 top
R92  1k  [R0603]  22.86,120.02 270 top
R93  1k  [R0603]  22.86,123.83 270 top
R94  1k  [R0603]  22.86,127.64 270 top
R95  1k  [R0603]  15.24,116.2 270 top
R96  1k  [R0603]  15.24,120.02 270 top
R97  1k  [R0603]  15.24,123.83 270 top
R98  1k  [R0603]  15.24,127.64 270 top
R99  1k  [R0603]  7.62,116.2 270 top
R100  1k  [R0603]  7.62,120.02 270 top
R101  1k  [R0603]  7.62,123.83 270 top
R102  1k  [R0603]  7.62,127.64 270 top
R103  68  [R0603]  33.02,167 270 top
R104  68  [R0603]  25.4,167 270 top
R105  68  [R0603]  17.78,167 270 top
R106  68  [R0603]  10.16,167 270 top
R107  120  [R0603]  139.7,170.81 270 top
R108  120  [R0603]  132.08,170.81 270 top
R109  120  [R0603]  124.46,170.81 270 top
R110  120  [R0603]  116.84,170.81 270 top
R111  120  [R0603]  109.22,170.81 270 top
R112  120  [R0603]  101.6,170.81 270 top
R113  120  [R0603]  93.98,170.81 270 top
R114  120  [R0603]  86.36,170.81 270 top
R115  120  [R0603]  78.74,170.81 270 top
R116  120  [R0603]  71.12,170.81 270 top
R117  120  [R0603]  63.5,170.81 270 top
R118  120  [R0603]  55.88,170.81 270 top
R119  120  [R0603]  48.26,170.81 270 top
R120  120  [R0603]  40.64,170.81 270 top
R121  120  [R0603]  33.02,170.81 270 top
R122  120  [R0603]  25.4,170.81 270 top
R123  120  [R0603]  17.78,170.81 270 top
R124  120  [R0603]  10.16,170.81 270 top
R125  1k  [R0603]  54.61,61.59 0 top
R126  1k  [R0603]  63.5,61.59 0 top
R127  1k  [R0603]  54.61,56.52 0 top
R128  1k  [R0603]  63.5,56.52 0 top
R129  1k  [R0603]  45.72,61.59 0 top
R130  1k  [R0603]  16.51,9.53 180 top
R131  2.2k  [R0603]  16.51,6.99 180 top
R132  R_1K_0603  [R0603]  16.51,4.45 180 top
R133  10k  [R0603]  77.47,66.67 0 top
R134  10k  [R0603]  97.79,53.98 0 top
R135  10k  [R0603]  87.63,53.98 0 top
R136  10k  [R0603]  97.79,66.67 0 top
R137  10k  [R0603]  87.63,66.67 0 top
R138  10  [R1206]  144.15,184.15 270 top
R139  1k  [R0603]  16.51,1.91 180 top
R140  68  [R0603]  154.94,156.84 90 top
R141  68  [R0603]  154.94,153.03 90 top
R142  68  [R0603]  154.94,149.22 90 top
R143  68  [R0603]  152.4,149.22 90 top
R144  68  [R0603]  147.32,156.84 90 top
R145  68  [R0603]  147.32,153.03 90 top
R146  68  [R0603]  147.32,149.22 90 top
R147  68  [R0603]  144.78,149.22 90 top
R148  68  [R0603]  139.7,156.84 90 top
R149  68  [R0603]  139.7,153.03 90 top
R150  68  [R0603]  139.7,149.22 90 top
R151  68  [R0603]  137.16,149.22 90 top
R152  68  [R0603]  132.08,156.84 90 top
R153  68  [R0603]  132.08,153.03 90 top
R154  68  [R0603]  132.08,149.22 90 top
R155  68  [R0603]  129.54,149.22 90 top
R156  68  [R0603]  124.46,156.84 90 top
R157  68  [R0603]  124.46,153.03 90 top
R158  68  [R0603]  124.46,149.22 90 top
R159  68  [R0603]  121.92,149.22 90 top
R160  68  [R0603]  116.84,156.84 90 top
R161  68  [R0603]  116.84,153.03 90 top
R162  68  [R0603]  116.84,149.22 90 top
R163  68  [R0603]  114.3,149.22 90 top
R164  68  [R0603]  109.22,156.84 90 top
R165  68  [R0603]  109.22,153.03 90 top
R166  68  [R0603]  109.22,149.22 90 top
R167  68  [R0603]  106.68,149.22 90 top
R168  68  [R0603]  101.6,156.84 90 top
R169  68  [R0603]  101.6,153.03 90 top
R170  68  [R0603]  101.6,149.22 90 top
R171  68  [R0603]  99.06,149.22 90 top
R172  68  [R0603]  93.98,156.84 90 top
R173  68  [R0603]  93.98,153.03 90 top
R174  68  [R0603]  93.98,149.22 90 top
R175  68  [R0603]  91.44,149.22 90 top
R176  68  [R0603]  86.36,156.84 90 top
R177  68  [R0603]  86.36,153.03 90 top
R178  68  [R0603]  86.36,149.22 90 top
R179  68  [R0603]  83.82,149.22 90 top
R180  68  [R0603]  78.74,156.84 90 top
R181  68  [R0603]  78.74,153.03 90 top
R182  68  [R0603]  78.74,149.22 90 top
R183  68  [R0603]  76.2,149.22 90 top
R184  68  [R0603]  71.12,156.84 90 top
R185  68  [R0603]  71.12,153.03 90 top
R186  68  [R0603]  71.12,149.22 90 top
R187  68  [R0603]  68.58,149.22 90 top
R188  68  [R0603]  63.5,156.84 90 top
R189  68  [R0603]  63.5,153.03 90 top
R190  68  [R0603]  63.5,149.22 90 top
R191  68  [R0603]  60.96,149.22 90 top
R192  68  [R0603]  48.26,156.84 90 top
R193  68  [R0603]  55.88,156.84 90 top
R194  68  [R0603]  55.88,153.03 90 top
R195  68  [R0603]  55.88,149.22 90 top
R196  68  [R0603]  53.34,149.22 90 top
R197  68  [R0603]  48.26,153.03 90 top
R198  68  [R0603]  48.26,149.22 90 top
R199  68  [R0603]  45.72,149.22 90 top
R200  68  [R0603]  40.64,156.84 90 top
R201  68  [R0603]  40.64,153.03 90 top
R202  68  [R0603]  40.64,149.22 90 top
R203  68  [R0603]  38.1,149.22 90 top
R204  68  [R0603]  33.02,156.84 90 top
R205  68  [R0603]  33.02,153.03 90 top
R206  68  [R0603]  33.02,149.22 90 top
R207  68  [R0603]  30.48,149.22 90 top
R208  68  [R0603]  25.4,156.84 90 top
R209  68  [R0603]  25.4,153.03 90 top
R210  68  [R0603]  25.4,149.22 90 top
R211  68  [R0603]  22.86,149.22 90 top
R212  68  [R0603]  17.78,156.84 90 top
R213  68  [R0603]  17.78,153.03 90 top
R214  68  [R0603]  17.78,149.22 90 top
R215  68  [R0603]  15.24,149.22 90 top
R216  68  [R0603]  10.16,156.84 90 top
R217  68  [R0603]  10.16,153.03 90 top
R218  68  [R0603]  10.16,149.22 90 top
R219  68  [R0603]  7.62,149.22 90 top
R220  R_270R_0603  [R0603]  83.82,64.14 0 top
R221  R_56R_0603  [R0603]  93.98,64.14 0 top
R222  R_56R_0603  [R0603]  83.82,51.44 0 top
R223  R_270R_0603  [R0603]  93.98,51.44 0 top
R224  R_82R_0603  [R0603]  73.66,64.14 0 top
R225  R_1K_0603  [R0603]  16.51,12.06 180 top
R226  68  [R0603]  154.94,111.76 90 top
R227  68  [R0603]  152.4,111.76 90 top
R228  68  [R0603]  154.94,107.95 90 top
R229  68  [R0603]  152.4,107.95 90 top
R230  68  [R0603]  147.32,111.76 90 top
R231  68  [R0603]  144.78,111.76 90 top
R232  68  [R0603]  147.32,107.95 90 top
R233  68  [R0603]  144.78,107.95 90 top
R234  68  [R0603]  137.16,107.95 90 top
R235  68  [R0603]  139.7,107.95 90 top
R236  68  [R0603]  137.16,111.76 90 top
R237  68  [R0603]  139.7,111.76 90 top
R238  68  [R0603]  129.54,111.76 90 top
R239  68  [R0603]  132.08,111.76 90 top
R240  68  [R0603]  132.08,107.95 90 top
R241  68  [R0603]  129.54,107.95 90 top
R242  68  [R0603]  121.92,107.95 90 top
R243  68  [R0603]  121.92,111.76 90 top
R244  68  [R0603]  124.46,107.95 90 top
R245  68  [R0603]  124.46,111.76 90 top
R246  68  [R0603]  114.3,107.95 90 top
R247  68  [R0603]  114.3,111.76 90 top
R248  68  [R0603]  116.84,107.95 90 top
R249  68  [R0603]  116.84,111.76 90 top
R250  68  [R0603]  106.68,107.95 90 top
R251  68  [R0603]  106.68,111.76 90 top
R252  68  [R0603]  109.22,107.95 90 top
R253  68  [R0603]  109.22,111.76 90 top
R254  68  [R0603]  99.06,107.95 90 top
R255  68  [R0603]  99.06,111.76 90 top
R256  68  [R0603]  101.6,107.95 90 top
R257  68  [R0603]  101.6,111.76 90 top
R258  68  [R0603]  91.44,107.95 90 top
R259  68  [R0603]  91.44,111.76 90 top
R260  68  [R0603]  93.98,107.95 90 top
R261  68  [R0603]  93.98,111.76 90 top
R262  68  [R0603]  83.82,107.95 90 top
R263  68  [R0603]  83.82,111.76 90 top
R264  68  [R0603]  86.36,107.95 90 top
R265  68  [R0603]  86.36,111.76 90 top
R266  68  [R0603]  76.2,107.95 90 top
R267  68  [R0603]  76.2,111.76 90 top
R268  68  [R0603]  78.74,107.95 90 top
R269  68  [R0603]  78.74,111.76 90 top
R270  68  [R0603]  68.58,107.95 90 top
R271  68  [R0603]  68.58,111.76 90 top
R272  68  [R0603]  71.12,107.95 90 top
R273  68  [R0603]  71.12,111.76 90 top
R274  68  [R0603]  60.96,107.95 90 top
R275  68  [R0603]  60.96,111.76 90 top
R276  68  [R0603]  63.5,107.95 90 top
R277  68  [R0603]  63.5,111.76 90 top
R278  68  [R0603]  53.34,107.95 90 top
R279  68  [R0603]  53.34,111.76 90 top
R280  68  [R0603]  55.88,107.95 90 top
R281  68  [R0603]  55.88,111.76 90 top
R282  68  [R0603]  45.72,107.95 90 top
R283  68  [R0603]  45.72,111.76 90 top
R284  68  [R0603]  48.26,107.95 90 top
R285  68  [R0603]  48.26,111.76 90 top
R286  68  [R0603]  38.1,107.95 90 top
R287  68  [R0603]  38.1,111.76 90 top
R288  68  [R0603]  40.64,107.95 90 top
R289  68  [R0603]  40.64,111.76 90 top
R290  68  [R0603]  31.11,107.95 90 top
R291  68  [R0603]  31.11,111.76 90 top
R292  68  [R0603]  33.66,107.95 90 top
R293  68  [R0603]  33.66,111.76 90 top
R294  68  [R0603]  25.4,111.76 90 top
R295  68  [R0603]  25.4,107.95 90 top
R296  68  [R0603]  22.86,111.76 90 top
R297  68  [R0603]  22.86,107.95 90 top
R298  68  [R0603]  15.88,107.95 90 top
R299  68  [R0603]  15.88,111.76 90 top
R300  68  [R0603]  18.41,107.95 90 top
R301  68  [R0603]  18.41,111.76 90 top
R302  68  [R0603]  7.62,107.95 90 top
R303  68  [R0603]  7.62,111.76 90 top
R304  68  [R0603]  10.16,107.95 90 top
R305  68  [R0603]  10.16,111.76 90 top
R306  R_220R_0603  [R0603]  23.5,40.64 0 top
R307  R_220R_0603  [R0603]  44.45,40.64 0 top
R308  1k  [R0603]  152.4,104.14 270 top
R309  1k  [R0603]  154.94,104.14 270 top
R310  R_1K_0603  [R0603]  69.85,11.43 270 top
R311  1k  [R0603]  144.78,104.14 270 top
R312  1k  [R0603]  147.32,104.14 270 top
R313  1k  [R0603]  137.16,104.14 270 top
R314  1k  [R0603]  139.7,104.14 270 top
R315  1k  [R0603]  129.54,104.14 270 top
R316  1k  [R0603]  132.08,104.14 270 top
R317  1k  [R0603]  121.92,104.14 270 top
R318  1k  [R0603]  124.46,104.14 270 top
R319  1k  [R0603]  114.3,104.14 270 top
R320  1k  [R0603]  116.84,104.14 270 top
R321  1k  [R0603]  106.68,104.14 270 top
R322  1k  [R0603]  109.22,104.14 270 top
R323  1k  [R0603]  99.06,104.14 270 top
R324  1k  [R0603]  101.6,104.14 270 top
R325  1k  [R0603]  91.44,104.14 270 top
R326  1k  [R0603]  93.98,104.14 270 top
R327  1k  [R0603]  83.82,104.14 270 top
R328  1k  [R0603]  86.36,104.14 270 top
R329  1k  [R0603]  76.2,104.14 270 top
R330  1k  [R0603]  78.74,104.14 270 top
R331  1k  [R0603]  68.58,104.14 270 top
R332  1k  [R0603]  71.12,104.14 270 top
R333  1k  [R0603]  60.96,104.14 270 top
R334  1k  [R0603]  63.5,104.14 270 top
R335  1k  [R0603]  53.34,104.14 270 top
R336  1k  [R0603]  55.88,104.14 270 top
R337  1k  [R0603]  45.72,104.14 270 top
R338  1k  [R0603]  48.26,104.14 270 top
R339  1k  [R0603]  38.1,104.14 270 top
R340  1k  [R0603]  40.64,104.14 270 top
R341  1k  [R0603]  31.11,104.14 270 top
R342  1k  [R0603]  33.66,104.14 270 top
R343  1k  [R0603]  22.86,104.14 270 top
R344  1k  [R0603]  25.4,104.14 270 top
R345  1k  [R0603]  15.88,104.14 270 top
R346  1k  [R0603]  18.41,104.14 270 top
R347  1k  [R0603]  7.62,104.14 270 top
R348  1k  [R0603]  10.16,104.14 270 top
S1  MOMENTARY-SWITCH-SPST-PTH-6.0MM  [TACTILE_SWITCH_PTH_6.0MM]  87.63,59.05 0 top
S2  MOMENTARY-SWITCH-SPST-PTH-6.0MM  [TACTILE_SWITCH_PTH_6.0MM]  97.79,59.05 0 top
S3  MOMENTARY-SWITCH-SPST-PTH-6.0MM  [TACTILE_SWITCH_PTH_6.0MM]  87.63,46.35 0 top
S4  MOMENTARY-SWITCH-SPST-PTH-6.0MM  [TACTILE_SWITCH_PTH_6.0MM]  97.79,46.35 0 top
S5  MOMENTARY-SWITCH-SPST-PTH-6.0MM  [TACTILE_SWITCH_PTH_6.0MM]  77.47,59.05 0 top
STAR_1  B8B-PH-K  [B8B-PH-K]  150.5,161.29 90 top
STAR_2  B8B-PH-K  [B8B-PH-K]  142.88,161.29 90 top
STAR_3  B8B-PH-K  [B8B-PH-K]  135.25,161.29 90 top
STAR_4  B8B-PH-K  [B8B-PH-K]  127.64,161.29 90 top
STAR_5  B8B-PH-K  [B8B-PH-K]  120.02,161.29 90 top
STAR_6  B8B-PH-K  [B8B-PH-K]  112.39,161.29 90 top
STAR_7  B8B-PH-K  [B8B-PH-K]  104.78,161.29 90 top
STAR_8  B8B-PH-K  [B8B-PH-K]  97.16,161.29 90 top
STAR_9  B8B-PH-K  [B8B-PH-K]  89.53,161.29 90 top
STAR_10  B8B-PH-K  [B8B-PH-K]  81.92,161.29 90 top
STAR_11  B8B-PH-K  [B8B-PH-K]  74.3,161.29 90 top
STAR_12  B8B-PH-K  [B8B-PH-K]  66.67,161.29 90 top
STAR_13  B8B-PH-K  [B8B-PH-K]  59.05,161.29 90 top
STAR_14  B8B-PH-K  [B8B-PH-K]  51.44,161.29 90 top
STAR_15  B8B-PH-K  [B8B-PH-K]  43.81,161.29 90 top
STAR_16  B8B-PH-K  [B8B-PH-K]  36.2,161.29 90 top
STAR_17  B8B-PH-K  [B8B-PH-K]  28.57,161.29 90 top
STAR_18  B8B-PH-K  [B8B-PH-K]  20.95,161.29 90 top
STAR_19  B8B-PH-K  [B8B-PH-K]  13.34,161.29 90 top
STAR_20  B8B-PH-K  [B8B-PH-K]  5.71,161.29 90 top
U1  6N138SDM  [COUPL_6N138SDM]  35.56,41.91 0 top
U$1  ESP32DEVKITV1  [ESP32-DEVKITV1]  69.85,17.14 0 top
ULN2  [SO18L]  34.92,63.5 270 top

## Library data of the parts
ACCESSORY ACCESSORY_GPIO ESTOP_2 I2C JP1-JP4 JTAG = pinhead
APA102 ESTOP MIDI_IN = con-jst-ph
C1-C3 C5 C7-C13 C34-C36 = rcl; LCSC_PART: C19702; SPICEPREFIX: C
C4 C6 C14-C33 C130 = rcl; LCSC_PART: C15849; SPICEPREFIX: C
C37-C68 C73-C88 C93-C123 = rcl; LCSC_PART: C14663; SPICEPREFIX: C
C69-C71 C89 C90 = rcl; DIST: https://amzn.to/3iR84VS; SPICEPREFIX: C
C124 = rcl; LCSC_PART: C1588; SPICEPREFIX: C
C125 = JLC PCB Basic Parts_loc; LCSC_DATASHEET: https://datasheet.lcsc.com/lcsc/1811071810_Samsung-Electro-Mechanics-CL10B102KB8NNNC_C1588.pdf; LCSC_PART: C1588; LCSC_ROTATION_CCW: 0; LCSC_STOCK: 2243141; PROPERTIES: 50V 1nF X7R ±10% 0603 ROHS
C126 C127 = JLC PCB Basic Parts_loc; LCSC_DATASHEET: https://datasheet.lcsc.com/lcsc/1809301912_YAGEO-CC0603KRX7R9BB104_C14663.pdf; LCSC_PART: C14663; LCSC_ROTATION_CCW: 0; LCSC_STOCK: 7111530; PROPERTIES: 50V 100nF X7R ±10% 0603 ROHS
D1 D2 D6 D10 D14 D18 D22 D26 D30 D34 D38 D42 D46 D53 D57 D61 D65 D69 D73 D77 D81 D86 D91 D199 D201 D203 D205 D207 D209 D211 D213 D215 D217 D219 D221 D223 D225 D227 D229 D231 D233 D235 D237 = SparkFun-LED; JLC_ROTATION: 180; LCSC_PART: C2286
D3 D7 D11 D15 D19 D23 D27 D31 D35 D39 D43 D47 D50 D54 D58 D62 D66 D70 D74 D78 D82 D87 D92 D200 D202 D204 D206 D208 D210 D212 D214 D216 D218 D220 D222 D224 D226 D228 D230 D232 D234 D236 D238 = SparkFun-LED; JLC_ROTATION: 180; LCSC_PART: C72043
D4 D8 D12 D16 D20 D24 D28 D32 D36 D40 D44 D48 D51 D55 D59 D63 D67 D71 D75 D79 D83 D88 D93 = SparkFun-LED; JLC_ROTATION: 180; LCSC_PART: C72041
D5 D9 D13 D17 D21 D25 D29 D33 D37 D41 D45 D49 D52 D56 D60 D64 D68 D72 D76 D80 D84 D89 = SparkFun-LED; JLC_ROTATION: 180; LCSC_PART: C2290
D85 D90 D94 = SparkFun-LED; JLC_ROTATION: 180; LCSC_PART: C72038
D95-D114 D198 = JLC PCB Basic Parts_loc; LCSC_DATASHEET: https://datasheet.lcsc.com/lcsc/1809140216_Changjiang-Electronics-Tech--CJ-B5819W-SL_C8598.pdf; LCSC_PART: C8598; LCSC_ROTATION_CCW: 180; LCSC_STOCK: 304161; PROPERTIES: 40V 600mV@1A 1A SOD-123 Schottky Barrier Diodes (SBD) ROHS
D115-D197 = SMBJ8.0CA; AVAILABILITY: In Stock; DESCRIPTION: 600 Watt TVS 5.0v working, 9v clamp; LCSC_PART: C78757; MF: Littelfuse Inc.; MP: SMBJ8.0CA; PACKAGE: DO-214 Littelfuse Inc.; PRICE: None; PURCHASE-URL: https://pricing.snapeda.com/search/part/SMBJ8.0CA/?ref=eda
F1 F2 = Fuse; CATEGORY: FUSE; DESCRIPTION: PTC Resettable Fuses; LCSC_PART: C78695; MANUFACTURER: BOURNS; MPN: MF-MSMF; OPERATING_TEMPERATURE: -40 °C to +85 °C; PART_STATUS: Active; ROHS_COMPLIANCE: RoHS Compliant; SERIES: MF-MSMF; SUB-CATEGORY: Resettable; TYPE: PTC
GAME_INTERFACE = con-jst-ph; LCSC_PART: C158028
H1-H4 = holes
IC1 IC3-IC21 = maxim; LCSC_PART: C8963; MF: MAXIM; MPN: MAX481CSA; OC_FARNELL: unknown; OC_NEWARK: 90C3817
IC2 = v-reg; JLC_ROTATION: 270; LCSC_PART: C6187; PRICE: 0.5
IC22 = v-reg; LCSC_PART: C347222; PRICE: 0.5
J1 = SparkFun-Connectors; PROD_ID: CONN-08671; SF_ID: PRT-08506
NEBULA_A NEBULA_B NEBULA_C NEBULA_D NEBULA_E NEBULA_F NEBULA_G NEBULA_H = MCP23017-E_SO; AVAILABILITY: In Stock; DESCRIPTION: I/O Expander 16 I²C 1.7 MHz 28-SOIC; LCSC_PART: C629440; MF: Microchip; MP: MCP23017-E/SO; PACKAGE: SOIC-28 Microchip; PRICE: None; PURCHASE-URL: https://pricing.snapeda.com/search/part/MCP23017-E/SO/?ref=eda
POWER_IN = con-phoenix-508-jm
R1 R2 R107-R124 = rcl; LCSC_PART: C22787; SPICEPREFIX: R
R3-R25 R28-R53 R66 R69-R82 R87-R102 R125-R130 R139 R308 R309 R311-R348 = rcl; LCSC_PART: C21190; SPICEPREFIX: R
R26 R27 = JLC PCB Basic Parts_loc; LCSC_DATASHEET: https://datasheet.lcsc.com/lcsc/2110252130_UNI-ROYAL-Uniroyal-Elec-0603WAF2001T5E_C22975.pdf; LCSC_PART: C22975; LCSC_ROTATION_CCW: 0; LCSC_STOCK: 3372290; PROPERTIES: ±1% 1/10W Thick Film Resistors 75V ±100ppm -55°C~+155°C 2kOhm 0603 ROHS
R54-R65 R83-R86 R103-R106 R140-R219 R226-R305 = rcl; LCSC_PART: c27592; SPICEPREFIX: R
R67 R133-R137 = rcl; LCSC_PART: C25804; SPICEPREFIX: R
R68 R138 = rcl; LCSC_PART: C17903; SPICEPREFIX: R
R131 = rcl; LCSC_PART: C4190; SPICEPREFIX: R
R132 R225 R310 = JLC PCB Basic Parts_loc; LCSC_DATASHEET: https://datasheet.lcsc.com/lcsc/2110252030_UNI-ROYAL-Uniroyal-Elec-0603WAF1001T5E_C21190.pdf; LCSC_PART: C21190; LCSC_ROTATION_CCW: 0; LCSC_STOCK: 5175299; PROPERTIES: ±1% 1/10W Thick Film Resistors 75V ±100ppm -55°C~+155°C 1kOhm 0603 ROHS
R220 R223 = JLC PCB Basic Parts_loc; LCSC_DATASHEET: https://datasheet.lcsc.com/lcsc/2110252130_UNI-ROYAL-Uniroyal-Elec-0603WAF2700T5E_C22966.pdf; LCSC_PART: C22966; LCSC_ROTATION_CCW: 0; LCSC_STOCK: 315292; PROPERTIES: ±1% 1/10W Thick Film Resistors 75V ±100ppm -55°C~+155°C 270Ohm 0603 ROHS
R221 R222 = JLC PCB Basic Parts_loc; LCSC_DATASHEET: https://datasheet.lcsc.com/lcsc/2110252230_UNI-ROYAL-Uniroyal-Elec-0603WAF560JT5E_C25196.pdf; LCSC_PART: C25196; LCSC_ROTATION_CCW: 0; LCSC_STOCK: 82739; PROPERTIES: ±1% 1/10W Thick Film Resistors 75V ±200ppm -55°C~+155°C 56Ohm 0603 ROHS
R224 = JLC PCB Basic Parts_loc; LCSC_DATASHEET: https://datasheet.lcsc.com/lcsc/2110252230_UNI-ROYAL-Uniroyal-Elec-0603WAF820JT5E_C23255.pdf; LCSC_PART: C23255; LCSC_ROTATION_CCW: 0; LCSC_STOCK: 149533; PROPERTIES: ±1% 1/10W Thick Film Resistors 75V ±100ppm -55°C~+155°C 82Ohm 0603 ROHS
R306 R307 = JLC PCB Basic Parts_loc; LCSC_DATASHEET: https://datasheet.lcsc.com/lcsc/2110252130_UNI-ROYAL-Uniroyal-Elec-0603WAF2200T5E_C22962.pdf; LCSC_PART: C22962; LCSC_ROTATION_CCW: 0; LCSC_STOCK: 607613; PROPERTIES: ±1% 1/10W Thick Film Resistors 75V ±100ppm -55°C~+155°C 220Ohm 0603 ROHS
S1-S5 = SparkFun-Switches; PROD_ID: SWCH-08441; SF_SKU: COM-00097
STAR_1-STAR_20 = con-jst-ph; LCSC_PART: C157974
U1 = 6N138SDM; AVAILABILITY: In Stock; DESCRIPTION: Optoisolator Darlington with Base Output 5000Vrms 1 Channel 8-SMD; LCSC_PART: C188666; MF: ON Semiconductor; MP: 6N138SDM; PACKAGE: PDIP GW-8 ON Semiconductor; PRICE: None; PURCHASE-URL: https://pricing.snapeda.com/search/part/6N138SDM/?ref=eda
U$1 = ESP32-DEVKITV1
ULN2 = SparkFun-IC-Special-Function; LCSC_PART: C9683